# Altium PCB Madromys.PcbDoc
Units mm, origin at the board's own origin, x right, y up, seen from the top; angles counter-clockwise.
Board outline 62 x 68 mm, 4 copper layers (Top Layer, Plane 1, Plane 2, Bottom Layer), stack 0.781 mm thick; 82 components, 45 nets, 282 pads, 179 vias.
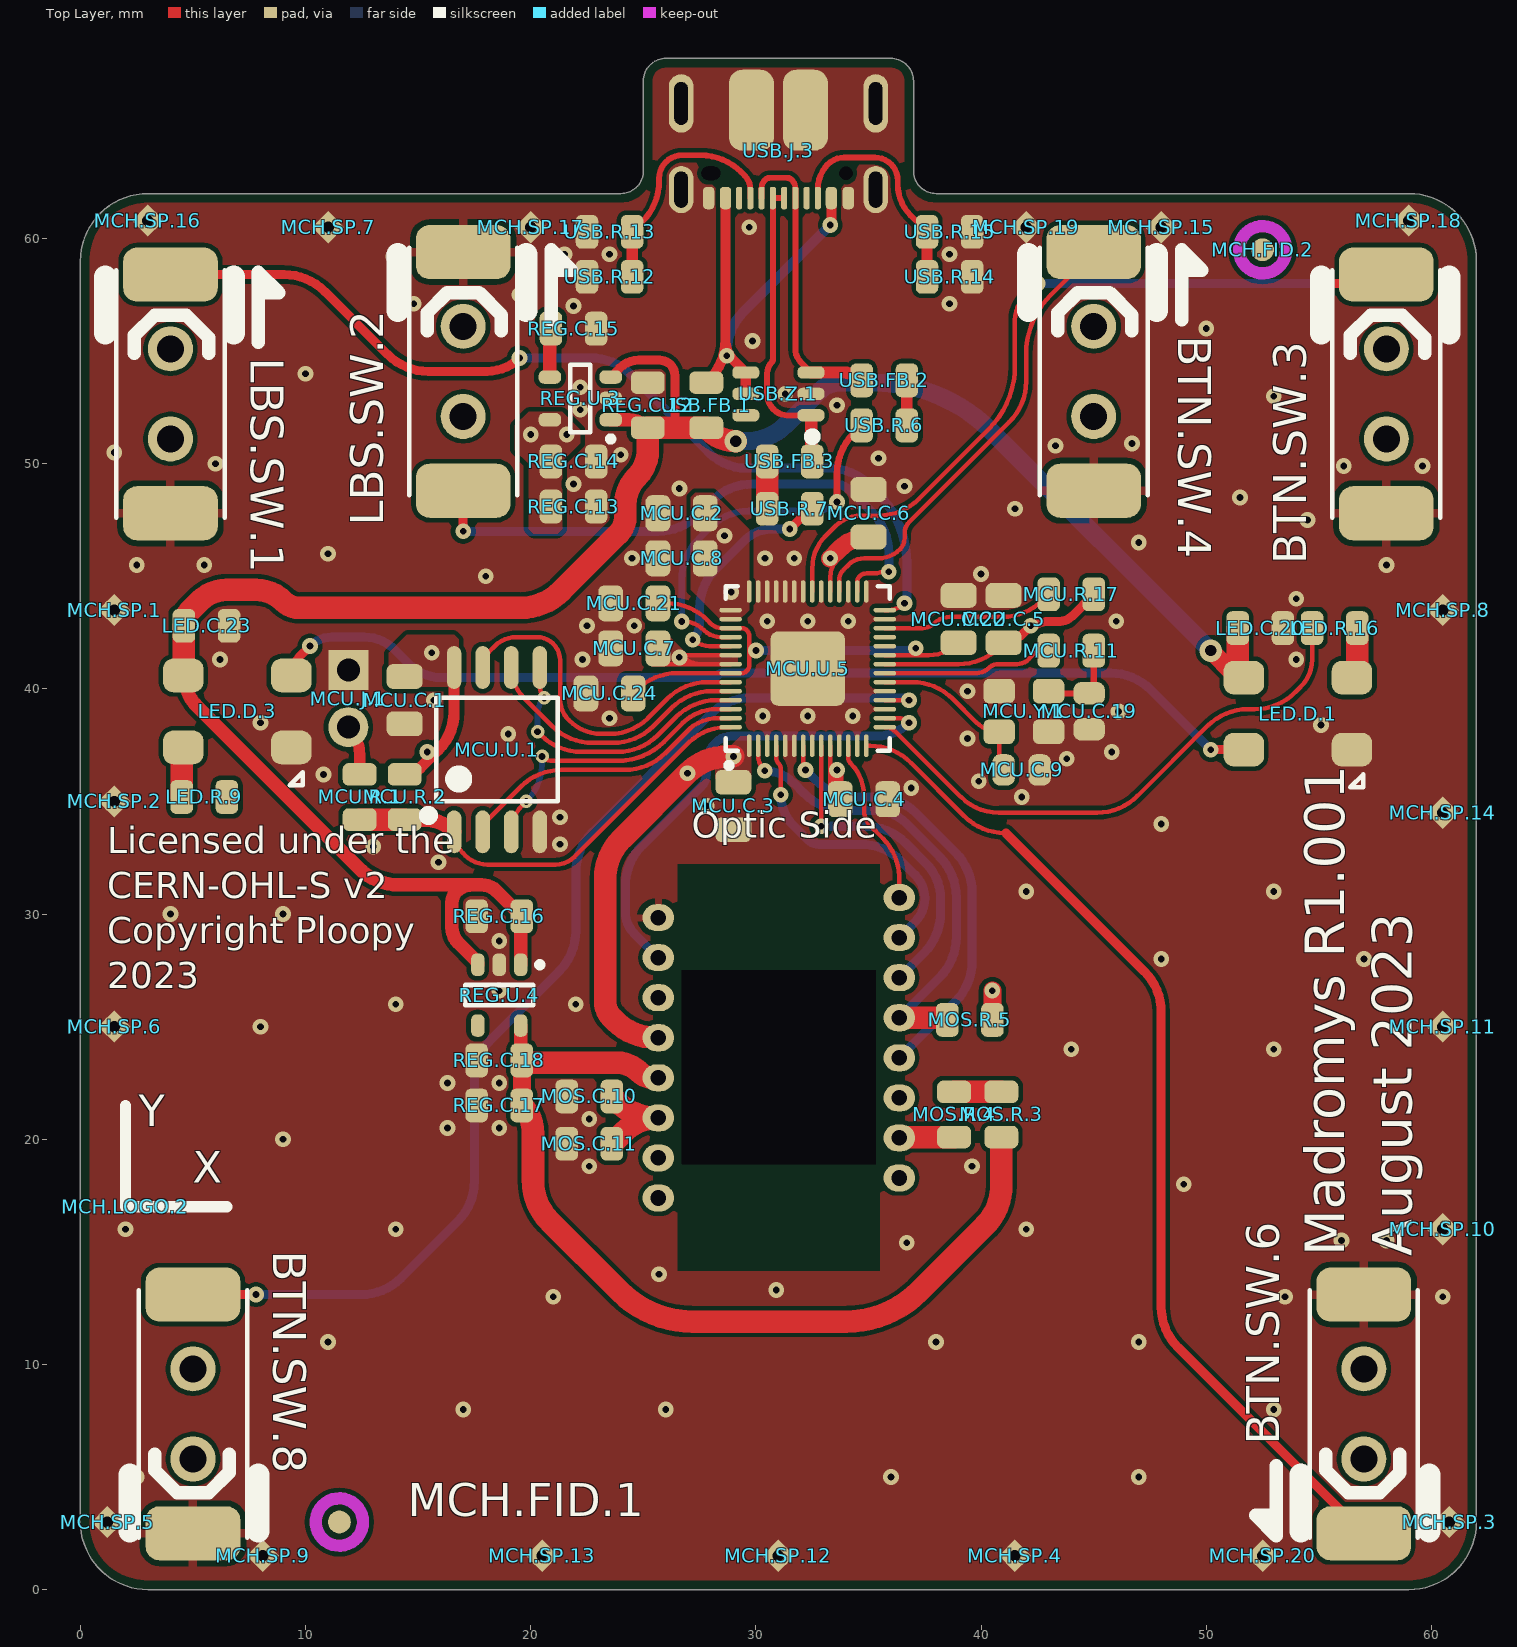
[diagram p0: Top Layer view]
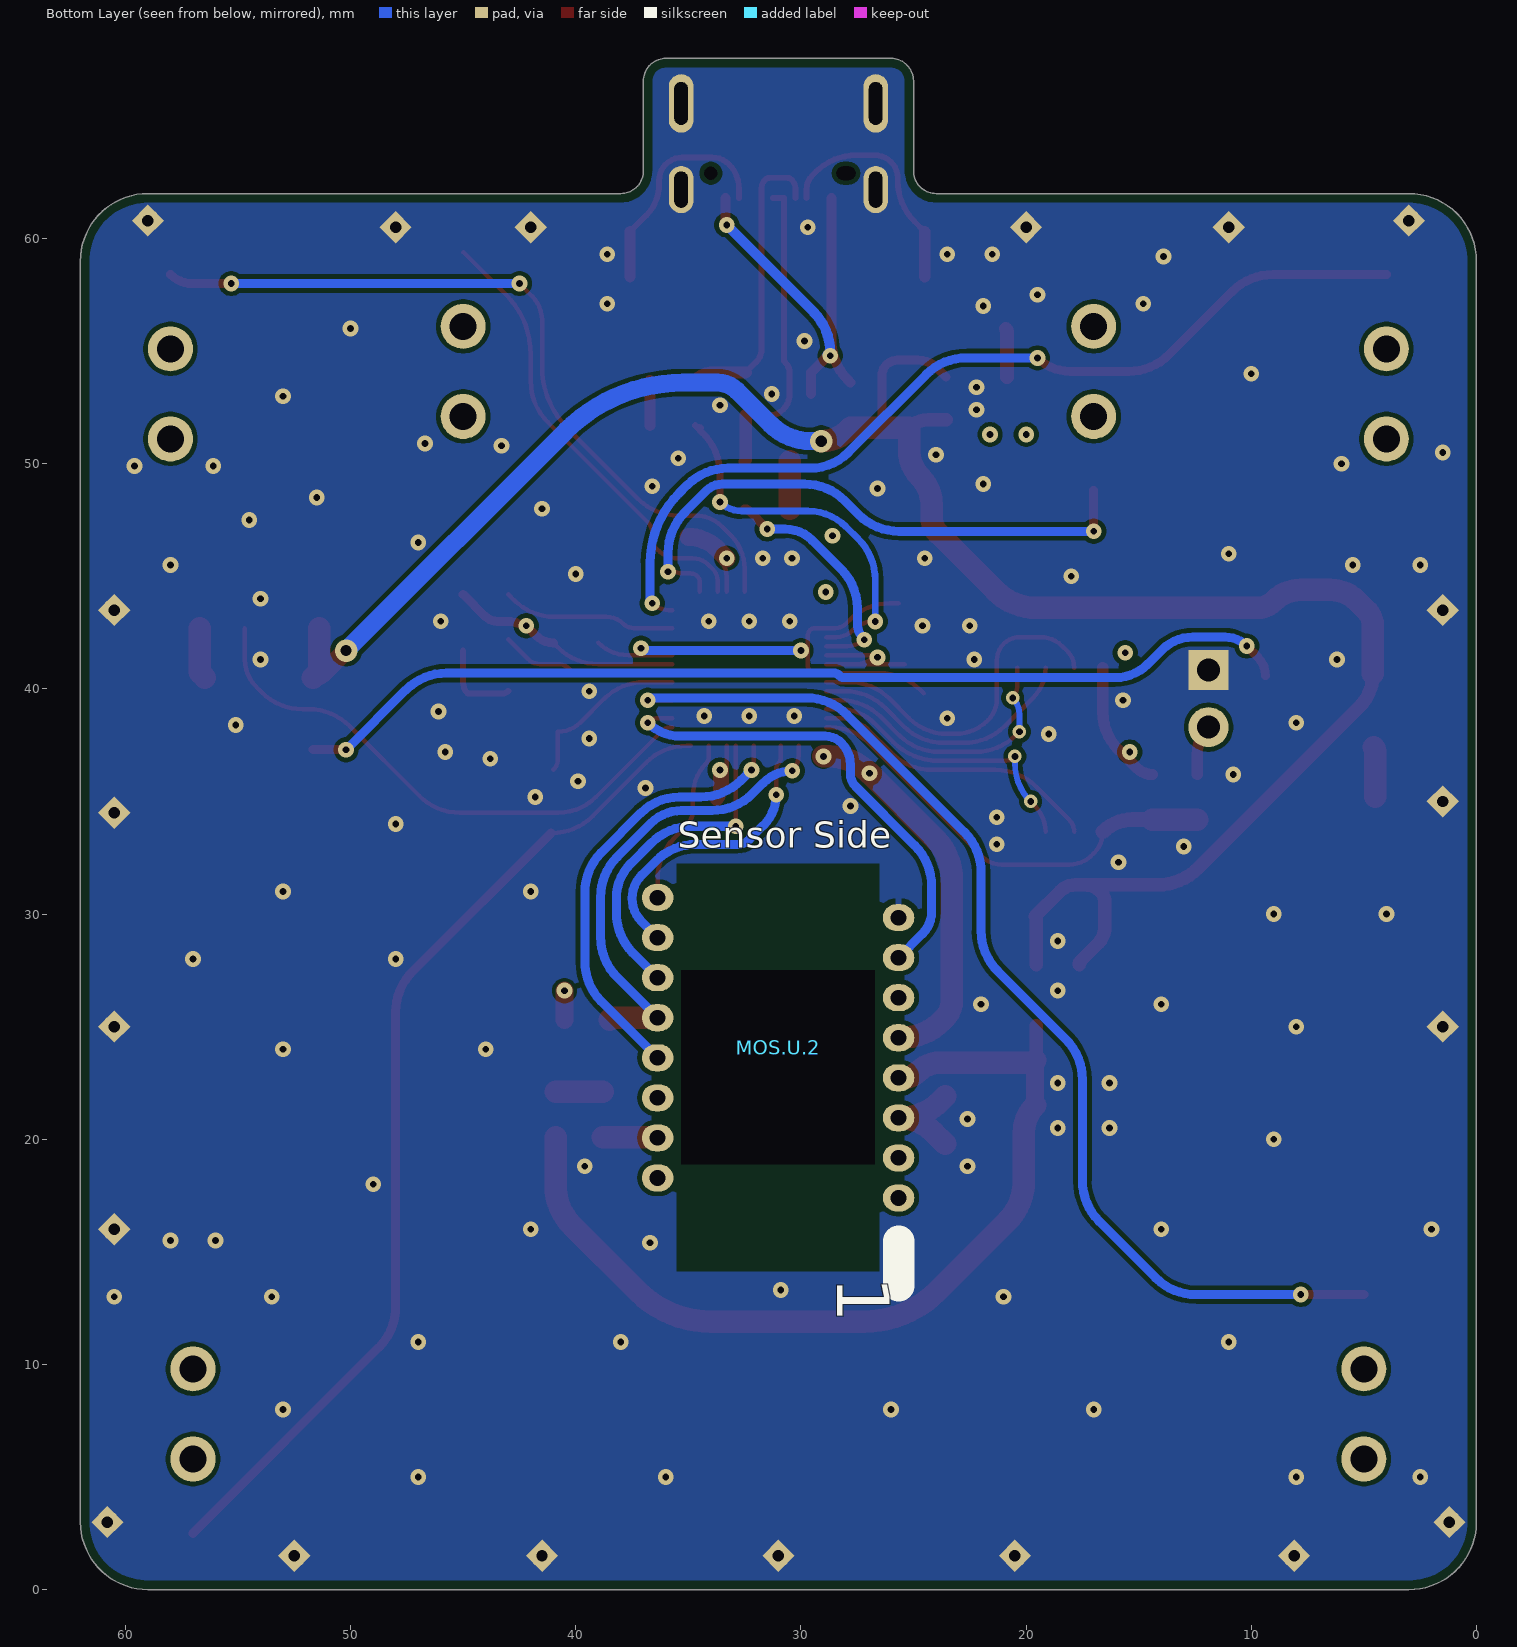
[diagram p1: Bottom Layer view, seen from below]
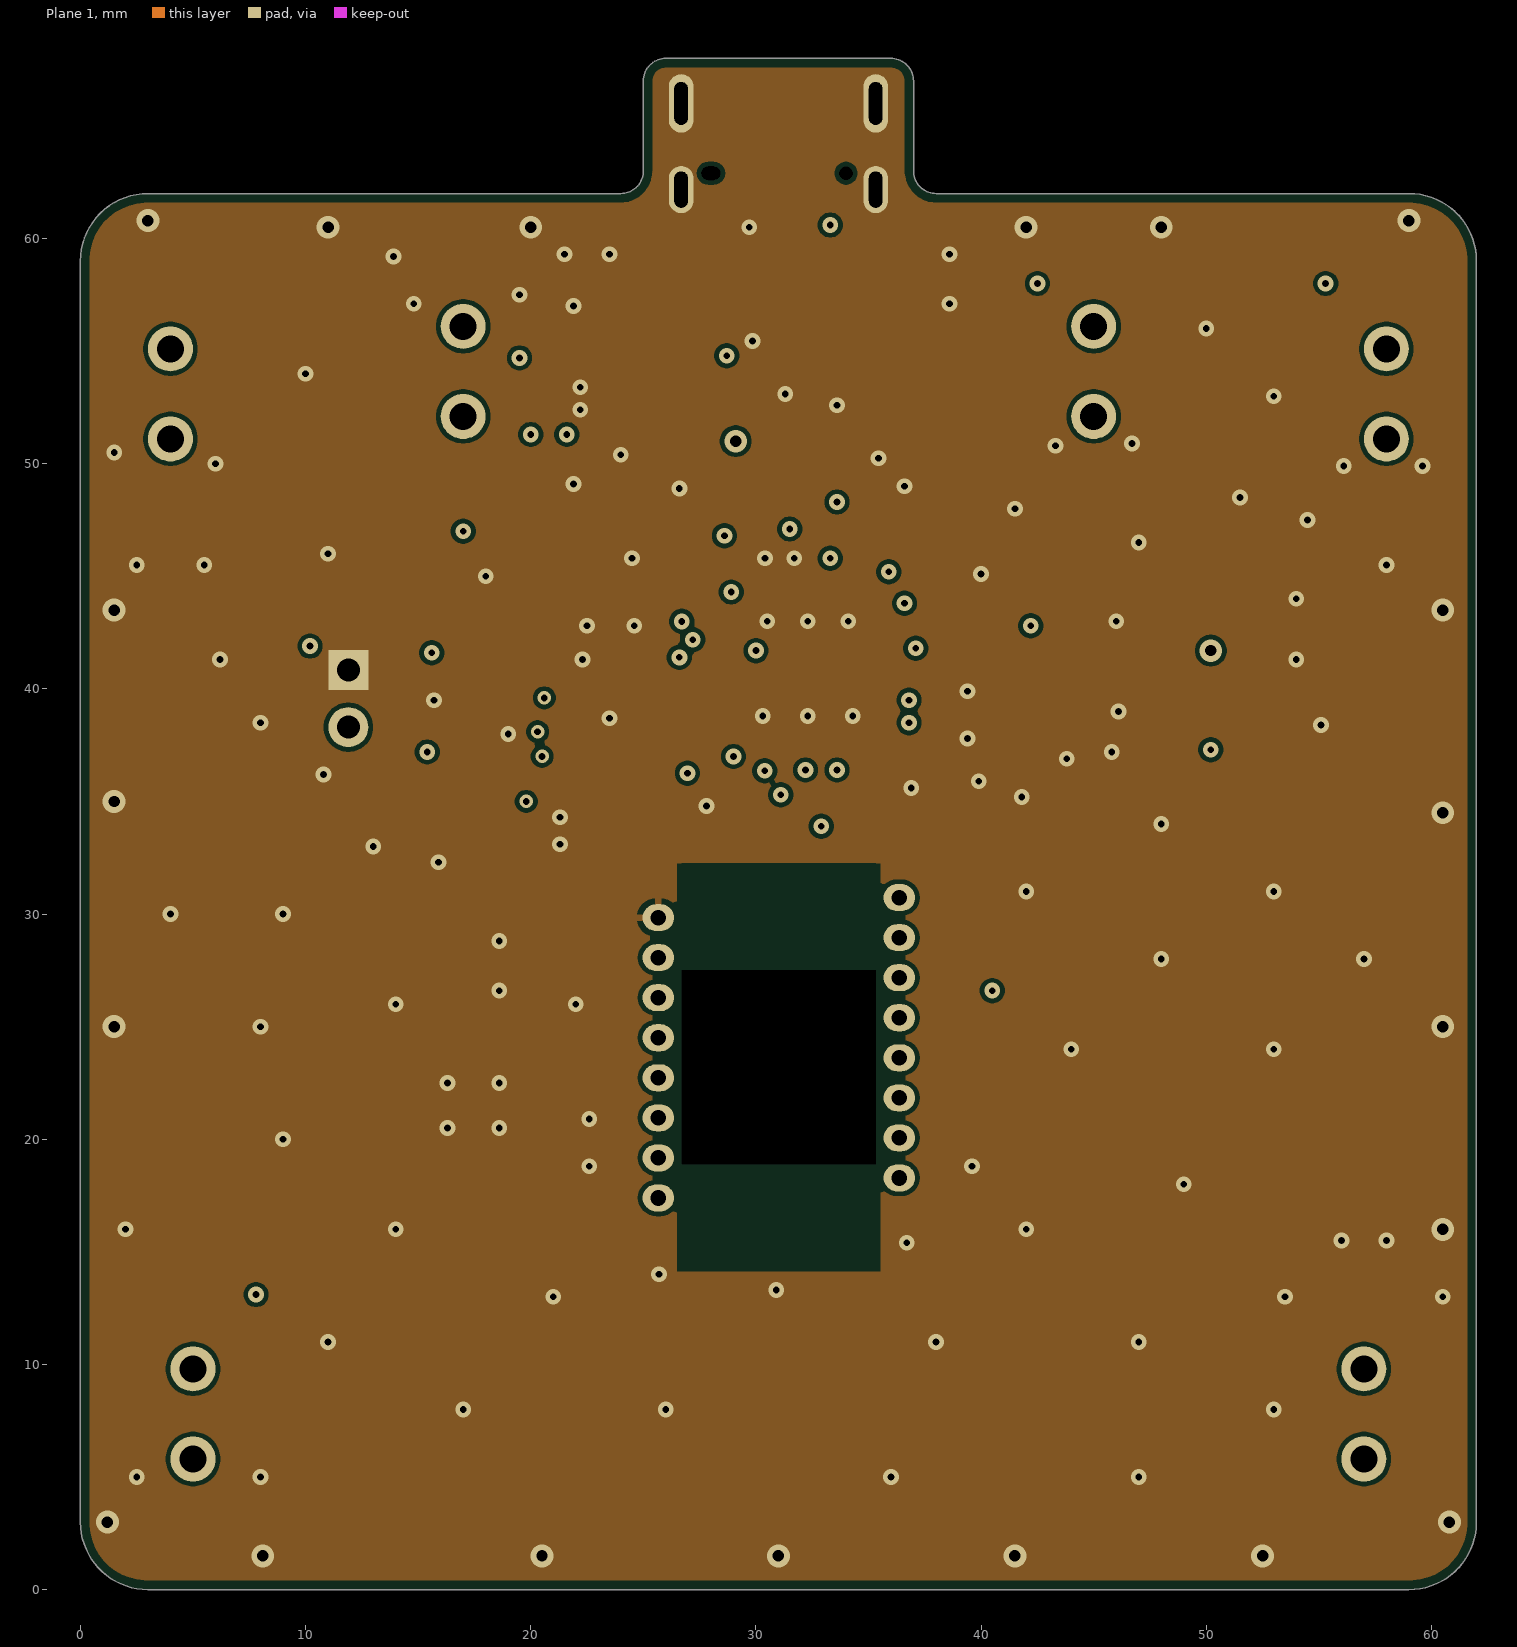
[diagram p2: Plane 1]
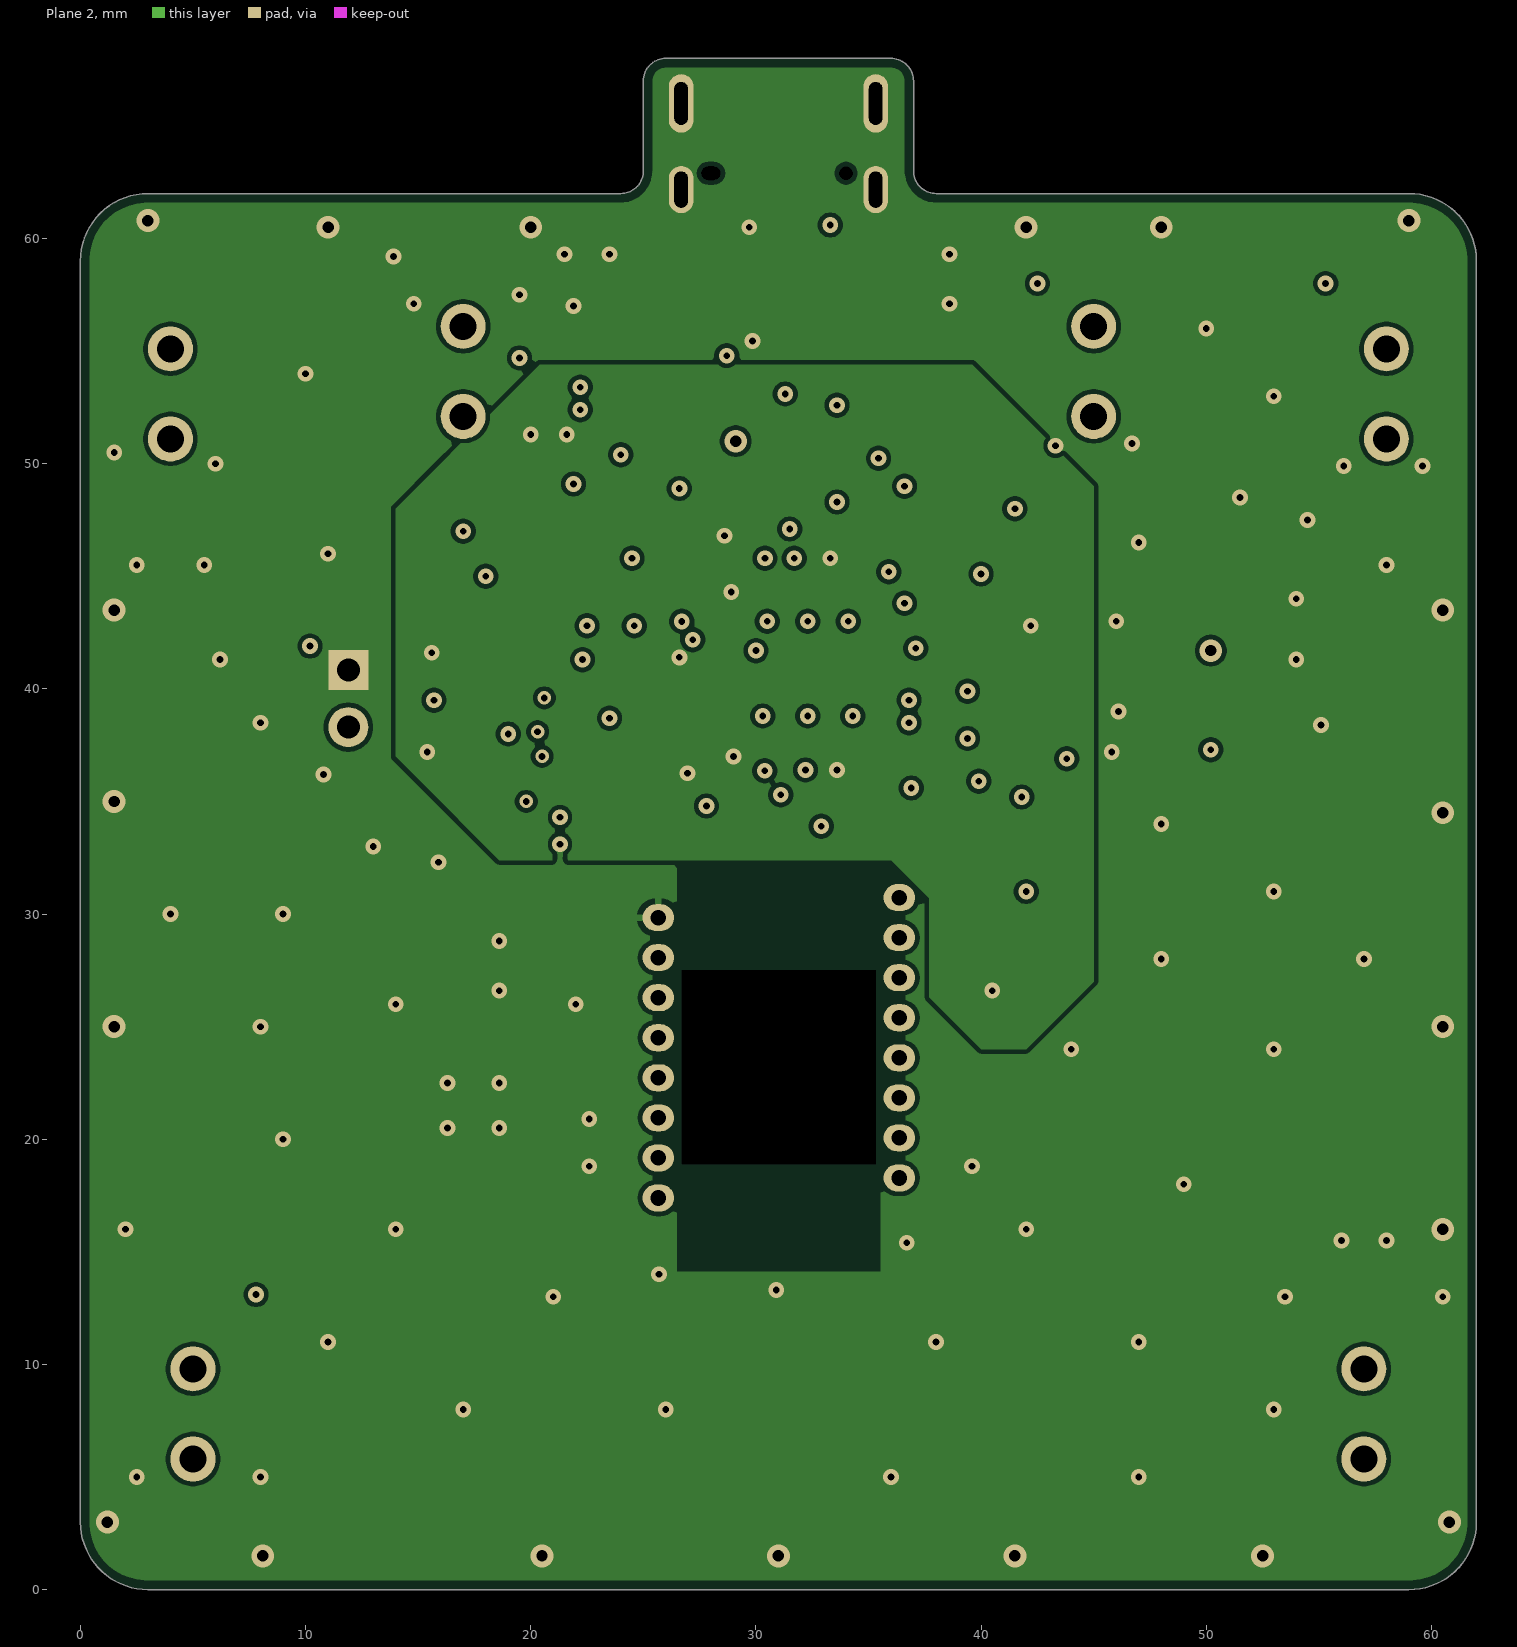
[diagram p3: Plane 2]

## Layer stack, top to bottom
Top Mask: solder mask 0.01, Solder Resist, Dk 3.5
Top Layer: signal copper 0.036
Dielectric 1: prepreg 0.127, FR-4, Dk 4.2
Plane 1: signal copper 0.036
Dielectric 4: core 0.383, Dk 4.2
Plane 2: signal copper 0.036
Dielectric 2: prepreg 0.127, Dk 4.2
Bottom Layer: signal copper 0.036
Bottom Solder: solder mask 0.01, Solder Resist, Dk 3.5

## Board outline
0,3 ccw(c3,3) 3,0 59,0 ccw(c59,3) 62,3 62,59 ccw(c59,59) 59,62 38,62 cw(c38,63) 37,63 37,67 ccw(c36,67) 36,68 26,68 ccw(c26,67) 25,67 25,63 cw(c24,63) 24,62 3,62 ccw(c3,59) 0,59

## Design rules (kind name [scope] priority, off if disabled: settings)
BoardOutlineClearance [(Not HasFootprint('SPARKGAP'))] p1: gap=0.4 ignorepadtopadclearanceinfootprint=FALSE except(0: Arc-SplitBarrior Arc-SplitContinuation Track-SplitBarrior Track-SplitContinuation Fill-SplitBarrior Fill-SplitContinuation Poly-SplitBarrior Poly-SplitContinuation Region-SplitBarrior Region-SplitContinuation Text-SplitBarrior Text-SplitContinuation)
Clearance "HighV Pads" [(InNetClass('HighV') AND (IsPad OR IsVia)) vs IsPad OR IsVia] p1: gap=0.4 ignorepadtopadclearanceinfootprint=FALSE except(0: Arc-Hole Track-Hole SMDPad-Hole THPad-Hole Via-Hole Fill-Hole Poly-Hole Region-Hole Text-Hole) // Establishes minimum clearance between bare pads that are high voltage, per IPC2221A Table 6-1, 51-100V, condition A6
Clearance Inter-Pad [IsPad vs IsPad] p2: gap=0.2 ignorepadtopadclearanceinfootprint=FALSE except(0: Arc-Hole Track-Hole SMDPad-Hole THPad-Hole Via-Hole Fill-Hole Poly-Hole Region-Hole Text-Hole)
Clearance "Spark Gaps" [InNetClass('Spark Gap') vs InNet('GND') And InPoly] p3: gap=0.635 ignorepadtopadclearanceinfootprint=FALSE except(0: Arc-Hole Track-Hole SMDPad-Hole THPad-Hole Via-Hole Fill-Hole Poly-Hole Region-Hole Text-Hole)
Clearance FIDs [Name like 'FID*'] p4: gap=1.016 ignorepadtopadclearanceinfootprint=FALSE except(0: Arc-Hole Track-Hole SMDPad-Hole THPad-Hole Via-Hole Fill-Hole Poly-Hole Region-Hole Text-Hole)
Clearance "Inner Planes" [InPoly AND OnMid] p5: gap=0.2 ignorepadtopadclearanceinfootprint=FALSE // Defines a larger clearance for planes on inner layers.
Clearance "All Planes" [InPoly] p6: gap=0.2 ignorepadtopadclearanceinfootprint=FALSE except(0: Arc-Hole Track-Hole SMDPad-Hole THPad-Hole Via-Hole Fill-Hole Poly-Hole Region-Hole Text-Hole) // Defines minimum clearance between planes on the same layer.
Clearance "Inner Layer Clearance" [OnMid vs OnMid] p7: gap=0.3 ignorepadtopadclearanceinfootprint=FALSE except(0: Arc-Hole Track-Hole SMDPad-Hole THPad-Hole Via-Hole Fill-Hole Poly-Hole Region-Hole Text-Hole) // We will give inner layers more spacing because they tend to be subject to stricter process limits.
Clearance [All] p8: gap=0.2 ignorepadtopadclearanceinfootprint=FALSE // 2 oz (70um) boards require at least 10mil spacing. We give a bit more to make sure things work well.
ComponentClearance "Terminal Block" [(HasFootprint('Phoenix 1933189 - Header')) vs (HasFootprint('Phoenix 1933189 - Header'))] p1: gap=-2.286 collisioncheckmode=3 verticalgap=0.254 showdistances=FALSE
ComponentClearance "FET/TP self Clearance" [(Name like 'Q*') Or (Name like 'TP*') vs (Name like 'Q*') Or (Name like 'TP*')] p2: gap=0.254 collisioncheckmode=3 verticalgap=0.254 showdistances=FALSE
ComponentClearance [Not ((Name like 'H*') Or (Name like 'FID*') Or (Name like 'SP*')) vs Not ((Name like 'H*') Or (Name like 'FID*') Or (Name like 'SP*'))] p3: gap=0.5 collisioncheckmode=3 verticalgap=0.5 showdistances=FALSE
DiffPairsRouting [All] p1: maxlimit=0.508 minlimit=0.279 mostfreqgap=0.381 toplayer_prefgap=0.279 toplayer_minwidth=0.279 toplayer_maxwidth=0.508 toplayer_prefwidth=0.381 midlayer2_mingap=0.305 midlayer2_minwidth=0.305 midlayer2_maxwidth=0.508 midlayer2_prefwidth=0.381 midlayer3_prefgap=0.279 midlayer3_minwidth=0.279 midlayer3_maxwidth=0.508 midlayer3_prefwidth=0.381 bottomlayer_prefgap=0.279 bottomlayer_minwidth=0.279 bottomlayer_maxwidth=0.508 bottomlayer_prefwidth=0.381 substack1={D919DD2D-F60F-4B9F-B5AE-F3E69D6E268F} toplayer_{d919dd2d-f60f-4b9f-b5ae-f3e69d6e268f}_minwidth=0.381 toplayer_{d919dd2d-f60f-4b9f-b5ae-f3e69d6e268f}_maxwidth=0.381 toplayer_{d919dd2d-f60f-4b9f-b5ae-f3e69d6e268f}_prefwidth=0.381 midlayer2_{d919dd2d-f60f-4b9f-b5ae-f3e69d6e268f}_minwidth=0.381 midlayer2_{d919dd2d-f60f-4b9f-b5ae-f3e69d6e268f}_maxwidth=0.381 midlayer2_{d919dd2d-f60f-4b9f-b5ae-f3e69d6e268f}_prefwidth=0.381 midlayer3_{d919dd2d-f60f-4b9f-b5ae-f3e69d6e268f}_minwidth=0.381 midlayer3_{d919dd2d-f60f-4b9f-b5ae-f3e69d6e268f}_maxwidth=0.381 midlayer3_{d919dd2d-f60f-4b9f-b5ae-f3e69d6e268f}_prefwidth=0.381 bottomlayer_{d919dd2d-f60f-4b9f-b5ae-f3e69d6e268f}_minwidth=0.381 bottomlayer_{d919dd2d-f60f-4b9f-b5ae-f3e69d6e268f}_maxwidth=0.381 bottomlayer_{d919dd2d-f60f-4b9f-b5ae-f3e69d6e268f}_prefwidth=0.381 maxuncoupledlength=12.7
Height [All] p1: minheight=0 maxheight=41 prefheight=12.7
HoleSize [All] p1: absolutevalues=TRUE maxlimit=100 minlimit=0.3 maxpercent=80.000 minpercent=20.000
HoleToHoleClearance [All] p1: gap=0.6 allowstackedmicrovias=TRUE
LayerPairs [All] p1: enforce=FALSE
MinimumSolderMaskSliver [All] p1: minsoldermaskwidth=0.09
NetAntennae [Not (HasFootprint('BALANCE_RESISTOR'))] p1: netantennaetolerance=0
PasteMaskExpansion [All] p1: expansion=-0.025
PlaneClearance [All] p1: clearance=0.3
PlaneConnect [All] p1: pad.planeconnectstyle=Relief pad.reliefexpansion=0.5 pad.reliefentries=4 pad.reliefconductorwidth=0.5 pad.reliefairgap=0.25 via.planeconnectstyle=Direct via.reliefexpansion=0.5 via.reliefentries=4 via.reliefconductorwidth=0.5 via.reliefairgap=0.25
PolygonConnect "PolygonConnect Spark Gap" [HasFootprint('SparkGap')] p1: connectstyle=Direct reliefconductorwidth=0.254 reliefentries=4 polygonreliefangle="90 Angle" airgapwidth=0.254 // This rule makes it so spark gaps get direct connections to ground planes.
PolygonConnect PolygonConnect_GND [All vs InNet('GND')] p2: connectstyle=Direct reliefconductorwidth=0.5 reliefentries=4 polygonreliefangle="90 Angle" airgapwidth=0.25 // This rule specifies all vias and holes connected to a GND plane have direct connections.
PolygonConnect [All] p3: connectstyle=Direct reliefconductorwidth=0.5 reliefentries=4 polygonreliefangle="90 Angle" airgapwidth=0.25
RoutingVias [All] p1: holewidth=0.5 width=1 viastyle="Through Hole" minholewidth=0.2 minwidth=0.5 maxholewidth=5.08 maxwidth=6.35
ShortCircuit [Not (InPadClass('TraceResistorPads')) vs Not (InPadClass('TraceResistorPads'))] p1: allowed=FALSE
SilkToBoardRegionClearance [All] p1 off:
SilkToSilkClearance [All] p1 off: silktosilkclearance=0.254
SilkToSolderMaskClearance SilkscreenOverComponentPads [IsPad] p1: minsilkscreentomaskgap=0.102 clearancetoexposedcopper=FALSE
SolderMaskExpansion SolderMaskExpansion_via [IsVia] p1: expansion=0.102 istentingtop=TRUE
SolderMaskExpansion [All] p2: expansion=0.076 istentingtop=FALSE
Width [All] p1: maxlimit=50.8 minlimit=0.2 preferedwidth=0.4 midlayer2_minwidth=0.35 midlayer3_minwidth=0.35 bottomlayer_minwidth=0.26 substack1={D919DD2D-F60F-4B9F-B5AE-F3E69D6E268F} toplayer_{d919dd2d-f60f-4b9f-b5ae-f3e69d6e268f}_minwidth=0.26 midlayer2_{d919dd2d-f60f-4b9f-b5ae-f3e69d6e268f}_minwidth=0.35 midlayer3_{d919dd2d-f60f-4b9f-b5ae-f3e69d6e268f}_minwidth=0.35 bottomlayer_{d919dd2d-f60f-4b9f-b5ae-f3e69d6e268f}_minwidth=0.26 minimp=50.000000 maximp=50.000000 favimp=50.000000
15 further rules are at their usual default settings.

## Classes and differential pairs
component class LED: LED.C.20 LED.C.23 LED.D.1 LED.D.3 LED.R.9 LED.R.16
component class BTN: BTN.SW.3 BTN.SW.4 BTN.SW.6 BTN.SW.8 LBS.SW.1 LBS.SW.2
component class USB: USB.FB.1 USB.FB.2 USB.FB.3 USB.J.3 USB.R.6 USB.R.7 USB.R.12 USB.R.13 USB.R.14 USB.R.15 USB.Z.1
component class REG: REG.C.12 REG.C.13 REG.C.14 REG.C.15 REG.C.16 REG.C.17 REG.C.18 REG.U.3 REG.U.4
component class MOS: MOS.C.10 MOS.C.11 MOS.R.3 MOS.R.4 MOS.R.5 MOS.U.2
component class MCU: MCU.C.1 MCU.C.2 MCU.C.3 MCU.C.4 MCU.C.5 MCU.C.6 MCU.C.7 MCU.C.8 MCU.C.9 MCU.C.19 MCU.C.21 MCU.C.22 MCU.C.24 MCU.J.1 MCU.R.1 MCU.R.2 MCU.R.11 MCU.R.17 MCU.U.1 MCU.U.5 MCU.Y.1
component class MCH: MCH.FID.1 MCH.FID.2 MCH.LOGO.2 MCH.SP.1 MCH.SP.2 MCH.SP.3 MCH.SP.4 MCH.SP.5 MCH.SP.6 MCH.SP.7 MCH.SP.8 MCH.SP.9 MCH.SP.10 MCH.SP.11 MCH.SP.12 MCH.SP.13 MCH.SP.14 MCH.SP.15 MCH.SP.16 MCH.SP.17 MCH.SP.18 MCH.SP.19 MCH.SP.20

## Components (designator, comment, footprint, x,y, rotation, side; value= is the part's Value field where it differs from the comment)
BTN.SW.3 "D2LS-21" D2LS-21 58,53.1 r270 top (schematic designator SW3)
BTN.SW.4 "D2LS-21" D2LS-21 45,54.1 r270 top (schematic designator SW4)
BTN.SW.6 "D2LS-21" D2LS-21 57,7.8 r90 top (schematic designator SW6)
BTN.SW.8 "D2LS-21" D2LS-21 5,7.8 r90 top (schematic designator SW8)
LBS.SW.1 "D2LS-21" D2LS-21 4,53.1 r270 top (schematic designator SW1)
LBS.SW.2 "D2LS-21" D2LS-21 17,54.1 r270 top (schematic designator SW2)
LED.C.20 "0805" 0805 52.4,42.7 r270 top value="0.1uF 100V" (schematic designator C20)
LED.C.23 "0805" 0805 5.6,42.8 r270 top value="0.1uF 100V" (schematic designator C23)
LED.D.1 "IN-PI55TATPRPGPB" IN-PI55TATPRPGPB 54.07,38.9 r0 top (schematic designator D1)
LED.D.3 "IN-PI55TATPRPGPB" IN-PI55TATPRPGPB 6.97,39 r0 top (schematic designator D3)
LED.R.9 "0805" 0805 5.5,35.2 r270 top value="1k 1%" (schematic designator R9)
LED.R.16 "0805" 0805 55.7,42.7 r270 top value="1k 1%" (schematic designator R16)
MCH.FID.1 "IPC-7351 Fiducial 1mm" FIDUCIAL_1.5 11.5,3 r90 top (schematic designator FID1)
MCH.FID.2 "IPC-7351 Fiducial 1mm" FIDUCIAL_1.5 52.5,59.5 r90 top (schematic designator FID2)
MCH.LOGO.2 "Coordinate system marker for assembly" "Coordinate System" 2,17 r0 top (schematic designator LOGO2)
MCH.SP.1 "Spark Gap" SparkGap 1.5,43.5 r90 top (schematic designator SP1)
MCH.SP.2 "Spark Gap" SparkGap 1.5,35 r90 top (schematic designator SP2)
MCH.SP.3 "Spark Gap" SparkGap 60.8,3 r90 top (schematic designator SP3)
MCH.SP.4 "Spark Gap" SparkGap 41.5,1.5 r90 top (schematic designator SP4)
MCH.SP.5 "Spark Gap" SparkGap 1.2,3 r90 top (schematic designator SP5)
MCH.SP.6 "Spark Gap" SparkGap 1.5,25 r90 top (schematic designator SP6)
MCH.SP.7 "Spark Gap" SparkGap 11,60.5 r90 top (schematic designator SP7)
MCH.SP.8 "Spark Gap" SparkGap 60.5,43.5 r90 top (schematic designator SP8)
MCH.SP.9 "Spark Gap" SparkGap 8.1,1.5 r90 top (schematic designator SP9)
MCH.SP.10 "Spark Gap" SparkGap 60.5,16 r90 top (schematic designator SP10)
MCH.SP.11 "Spark Gap" SparkGap 60.5,25 r90 top (schematic designator SP11)
MCH.SP.12 "Spark Gap" SparkGap 31,1.5 r90 top (schematic designator SP12)
MCH.SP.13 "Spark Gap" SparkGap 20.5,1.5 r90 top (schematic designator SP13)
MCH.SP.14 "Spark Gap" SparkGap 60.5,34.5 r90 top (schematic designator SP14)
MCH.SP.15 "Spark Gap" SparkGap 48,60.5 r90 top (schematic designator SP15)
MCH.SP.16 "Spark Gap" SparkGap 3,60.8 r90 top (schematic designator SP16)
MCH.SP.17 "Spark Gap" SparkGap 20,60.5 r90 top (schematic designator SP17)
MCH.SP.18 "Spark Gap" SparkGap 59,60.8 r90 top (schematic designator SP18)
MCH.SP.19 "Spark Gap" SparkGap 42,60.5 r90 top (schematic designator SP19)
MCH.SP.20 "Spark Gap" SparkGap 52.5,1.5 r90 top (schematic designator SP20)
MCU.C.1 "0805 X5R" "0805 - TALL" 14.4,39.5 r180 top value="0.1uF 100V" (schematic designator C1)
MCU.C.2 "0805 X5R" "0805 - TALL" 26.7,47.8 r90 top value="1uF 25V" (schematic designator C2)
MCU.C.3 "0805 X5R" "0805 - TALL" 29,34.8 r180 top value="0.1uF 100V" (schematic designator C3)
MCU.C.4 "0805 X5R" "0805 - TALL" 34.8,35.1 r270 top value="0.1uF 100V" (schematic designator C4)
MCU.C.5 "0805 X5R" "0805 - TALL" 41,43.1 r0 top value="0.1uF 100V" (schematic designator C5)
MCU.C.6 "0805 X5R" "0805 - TALL" 35,47.8 r0 top value="0.1uF 100V" (schematic designator C6)
MCU.C.7 "0805 X5R" "0805 - TALL" 24.6,41.8 r90 top value="0.1uF 100V" (schematic designator C7)
MCU.C.8 "0805 X5R" "0805 - TALL" 26.7,45.8 r90 top value="0.1uF 100V" (schematic designator C8)
MCU.C.9 "0603" 0603 41.8,36.4 r270 top value="18pF 50V" (schematic designator C9)
MCU.C.19 "0603" 0603 44.8,39 r0 top value="18pF 50V" (schematic designator C19)
MCU.C.21 "0805 X5R" "0805 - TALL" 24.6,43.8 r90 top value="1uF 25V" (schematic designator C21)
MCU.C.22 "0805 X5R" "0805 - TALL" 39,43.1 r0 top value="0.1uF 100V" (schematic designator C22)
MCU.C.24 "0805 X5R" "0805 - TALL" 23.5,39.8 r90 top value="0.1uF 100V" (schematic designator C24)
MCU.J.1 "HEADER2" 2x1 11.9,40.84 r0 top (schematic designator J1)
MCU.R.1 "0805" 0805 12.4,35.2 r0 top value="1k 1%" (schematic designator R1)
MCU.R.2 "0805" 0805 14.4,35.2 r0 top value="10k 1%" (schematic designator R2)
MCU.R.11 "0805" 0805 44,41.7 r90 top value="1k 1%" (schematic designator R11)
MCU.R.17 "0805" 0805 44,44.2 r270 top value="1k 1%" (schematic designator R17)
MCU.U.1 "W25Q16JVSSIQ" "W25Q128JVS - SOIC127P790X216-8M" 18.5,37.3 r90 top (schematic designator U1)
MCU.U.5 "RP2040" "RP2040 - QFN40P700X700X90_HS-57M" 32.3,40.9 r90 top (schematic designator U5)
MCU.Y.1 "RH100-12.000-16-3030" RH100-12.000-16-3030 41.9,39 r0 top (schematic designator Y1)
MOS.C.10 "0805" 0805 22.6,21.9 r90 top value="10uF 25V" (schematic designator C10)
MOS.C.11 "0805" 0805 22.6,19.8 r90 top value="0.1uF 100V" (schematic designator C11)
MOS.R.3 "0805" 0805 40.9,21.1 r0 top value="22R 1%" (schematic designator R3)
MOS.R.4 "0805" 0805 38.8,21.1 r180 top value="22R 1%" (schematic designator R4)
MOS.R.5 "0805" 0805 39.5,25.3 r90 top value="10k 1%" (schematic designator R5)
MOS.U.2 "PMW3360DM-T2QU" PMW3360DM-T2QU 25.666,17.395 r270 bottom (schematic designator U2)
REG.C.12 "0805" 0805 25.2,52.6 r0 top value="1uF 25V" (schematic designator C12)
REG.C.13 "0805" 0805 21.9,48.1 r270 top value="10uF 25V" (schematic designator C13)
REG.C.14 "0805" 0805 21.9,50.1 r270 top value="1uF 25V" (schematic designator C14)
REG.C.15 "0805" 0805 21.9,56 r270 top value="100pF 100V" (schematic designator C15)
REG.C.16 "0805" 0805 18.6,29.9 r90 top value="1uF 25V" (schematic designator C16)
REG.C.17 "0805" 0805 18.6,21.5 r90 top value="10uF 25V" (schematic designator C17)
REG.C.18 "0805" 0805 18.6,23.5 r90 top value="1uF 25V" (schematic designator C18)
REG.U.3 "AP2202K-3.3" "AP2202 - SOT95P270X145-5N" 22.2,52.9 r180 top (schematic designator U3)
REG.U.4 "AP2204K-1.8" "AP2202 - SOT95P270X145-5N" 18.6,26.4 r270 top (schematic designator U4)
USB.FB.1 "ACML-0805-601-T" 0805 27.8,52.6 r0 top (schematic designator FB1)
USB.FB.2 "ACML-0805-601-T" 0805 35.7,53.7 r90 top (schematic designator FB2)
USB.FB.3 "ACML-0805-601-T" 0805 31.5,50.1 r270 top (schematic designator FB3)
USB.J.3 "DX07S016JA1R1500" DX07S016JA1R1500 31,64.8 r180 top (schematic designator J3)
USB.R.6 "0805" 0805 35.698,51.7 r270 top value="22R 1%" (schematic designator R6)
USB.R.7 "0805" 0805 31.5,48 r90 top value="22R 1%" (schematic designator R7)
USB.R.12 "0805" 0805 23.5,58.3 r90 top value="10k 1%" (schematic designator R12)
USB.R.13 "0805" 0805 23.5,60.3 r90 top value="10k 1%" (schematic designator R13)
USB.R.14 "0805" 0805 38.6,58.3 r270 top value="10k 1%" (schematic designator R14)
USB.R.15 "0805" 0805 38.6,60.3 r270 top value="10k 1%" (schematic designator R15)
USB.Z.1 "IP4220CZ6,125" "PESD3V3S4UD - SOT95P275X110-6N" 31,53.1 r180 top (schematic designator Z1)

## Footprints (in the part's own frame and the unit in brackets; to place one, negate y for a bottom-side part, rotate by r counter-clockwise, add the part's x,y. Pads: shape width x height; smd on the part's side, far side on the other; paste and mask are expansions set on the pad)
2x1 [mil]
  rect 70x70 hole 40 paste-3897.64: 1(0,0)
  round 70 hole 40 paste-3897.64: 2(0,-100)
  body extent -50,-150 50,50, height 339
0603 [mm] "Chip Capacitor, 2-Leads, Body 1.6x0.8mm, IPC Medium Density"
  rrect70% 1.4x1 smd paste+0: 1(0,-0.8) 2(0,0.8)
  body extent -0.48,-0.88 0.48,0.87, height 0.65
0805 [mm] "Chip Capacitor, 2-Leads, Body 2.0x1.3mm, IPC Medium Density"
  rrect50% 1.5x1 smd paste+0: 1(0,1.002) 2(0,-1.002)
  body extent -0.72,-1.1 0.72,1.1, height 0.8
"0805 - TALL" [mm] "Same as 0805 footprint, but solder mask is adjusted to leave more paste behind for tall (>0.9mm) components like big caps, which tend to be solder-starved on the regular footprint."
  rrect50% 1.6x1.1 smd paste+0: 1(0,1.052) 2(0,-1.052)
  body extent -0.72,-1.1 0.72,1.1, height 0.8
"AP2202 - SOT95P270X145-5N" [mm] "SOT23, 5-Leads, Body 2.92x2.70mm, Pitch 0.95mm, IPC Medium Density"
  rrect80% 1x0.6 smd paste-0.04: 1(-1.35,0.95) 2(-1.35,0) 3(-1.35,-0.95) 4(1.35,-0.95) 5(1.35,0.95)
  silkscreen extent -1.48,-1.5 0.45,1.92, body extent -0.85,-1.52 0.85,1.52, height 1.45
"Coordinate System" [mm]
  silkscreen extent 0,0 4.5,4.5
D2LS-21 [mm]
  rrect50% 2.4x4.2 smd paste-0.05: A(-5.3,0) B(5.3,0)
  round 2 hole 1.2: ""(-2,0) ""(2,0)
  silkscreen extent -5.5,-2.9 5.5,2.8, body extent -5.6,-2.4 5.6,2.4, height 3.19
DX07S016JA1R1500 [mm] "USB-C (USB TYPE-C) USB 2.0 Receptacle Connector 24 (16+8 Dummy) Position Surface Mount, Right Angle; Through Hole"
  rrect70% 0.5x1 smd paste-0.05 mask+0.05: 1(-3.1,3) 2(-2.35,3) 11(2.35,3) 12(3.1,3)
  rrect70% 0.27x1 smd paste-0.04 mask+0.05: 3(-1.75,3) 4(-1.25,3) 5(-0.75,3) 6(-0.25,3) 7(0.25,3) 8(0.75,3) 9(1.25,3) 10(1.75,3)
  rrect100% 1.1x2.6 hole 0.6 slot 1.9 at 90 deg paste-99 mask+0.1: SHELL(-4.32,-1.2) SHELL(4.32,-1.2)
  rrect100% 1.1x2.1 hole 0.6 slot 1.6 at 90 deg paste-99 mask+0.1: SHELL(-4.32,2.625) SHELL(4.32,2.625)
  rrect60% 2x3.6 smd paste-0.12 mask+0.05: SHELL(-1.2,-0.9) SHELL(1.2,-0.9)
  round 0 hole 0.6: ""(-3,1.9)
  round 0 hole 0.6 slot 0.85 at 0 deg: ""(3,1.9)
  body extent -4.47,-3.65 4.47,3.25, height 3.18
FIDUCIAL_1.5 [mil]
  round 40 smd paste-60 mask+30: 1(0,0)
  Top Layer keep-out circle w21.65: c0,0 r41.34
IN-PI55TATPRPGPB [mm]
  rrect60% 1.8x1.5 smd paste-0.04 mask+0.06: 1(-2.4,1.6) 2(-2.4,-1.6) 3(2.4,-1.6) 4(2.4,1.6)
  silkscreen extent 2.32,-3.27 2.9,-2.7, body extent -2.5,-2.5 2.5,2.5, height 1.6
"PESD3V3S4UD - SOT95P275X110-6N" [mm] "SOT23, 6-Leads, Body 2.90x2.75mm, Pitch 0.95mm, IPC Medium Density"
  rrect80% 1.2x0.55 smd paste-0.03 mask+0.085: 1(-1.45,0.95) 2(-1.45,0) 3(-1.45,-0.95) 4(1.45,-0.95) 5(1.45,0) 6(1.45,0.95)
  silkscreen extent -1.63,1.78 -1.38,2.02, body extent -0.85,-1.55 0.85,1.55, height 1.1
PMW3360DM-T2QU [mm]
  oval 1.2x1.4 hole 0.7: 1(0,0) 2(-1.778,0) 3(-3.556,0) 4(-5.334,0) 5(-7.112,0) 6(-8.89,0) 7(-10.668,0) 8(-12.446,0) 9(-13.335,-10.7) 10(-11.557,-10.7) 11(-9.779,-10.7) 12(-8.001,-10.7) 13(-6.223,-10.7) 14(-4.445,-10.7) 15(-2.667,-10.7) 16(-0.889,-10.7)
  rect 0x0 hole 8.6 square unplated: ""(-5.8,-5.35)
  silkscreen extent 1.92,0 3.9,0, body extent -16.06,-14.76 5.09,4.09, height 2.44
RH100-12.000-16-3030 [mm] "3.2mm x 2.5mm crystal"
  rrect50% 1.4x1.1 smd paste-0.1: 1(-1.1,-0.9) 2(1.1,-0.9) 3(1.1,0.9) 4(-1.1,0.9)
  body extent -1.6,-1.25 1.6,1.25, height 1
"RP2040 - QFN40P700X700X90_HS-57M" [mm] "QFN, 56-Leads, Body 7.00x7.00mm, Pitch 0.40mm, Thermal Pad 3.10x3.10mm, IPC Low Density"
  oval 1x0.2 smd paste-99 mask+0.05: 1(-3.425,2.6) 2(-3.425,2.2) 3(-3.425,1.8) 4(-3.425,1.4) 5(-3.425,1) 6(-3.425,0.6) 7(-3.425,0.2) 8(-3.425,-0.2) 9(-3.425,-0.6) 10(-3.425,-1) 11(-3.425,-1.4) 12(-3.425,-1.8) 13(-3.425,-2.2) 14(-3.425,-2.6) 29(3.425,-2.6) 30(3.425,-2.2) 31(3.425,-1.8) 32(3.425,-1.4) 33(3.425,-1) 34(3.425,-0.6) 35(3.425,-0.2) 36(3.425,0.2) 37(3.425,0.6) 38(3.425,1) 39(3.425,1.4) 40(3.425,1.8) 41(3.425,2.2) 42(3.425,2.6)
  oval 0.2x1 smd paste-99 mask+0.05: 15(-2.6,-3.425) 16(-2.2,-3.425) 17(-1.8,-3.425) 18(-1.4,-3.425) 19(-1,-3.425) 20(-0.6,-3.425) 21(-0.2,-3.425) 22(0.2,-3.425) 23(0.6,-3.425) 24(1,-3.425) 25(1.4,-3.425) 26(1.8,-3.425) 27(2.2,-3.425) 28(2.6,-3.425) 43(2.6,3.425) 44(2.2,3.425) 45(1.8,3.425) 46(1.4,3.425) 47(1,3.425) 48(0.6,3.425) 49(0.2,3.425) 50(-0.2,3.425) 51(-0.6,3.425) 52(-1,3.425) 53(-1.4,3.425) 54(-1.8,3.425) 55(-2.2,3.425) 56(-2.6,3.425)
  rrect20% 3.3x3.3 smd paste-99: 57(0,0)
  silkscreen extent -4.42,-3.65 3.65,3.65, body extent -3.5,-3.5 3.5,3.5, height 0.9
SparkGap [mil]
  rect 40x40 smd rot 45 paste-99 mask+4: 1(0,0)
  rect 40x40 smd far side rot 45 paste-99 mask+4: 1(0,0)
"W25Q128JVS - SOIC127P790X216-8M" [mm] "SOIC, 8-Leads, Body 5.28x5.28mm, Pitch 1.27mm, IPC Low Density"
  oval 1.9x0.65 smd paste-0.05: 1(-3.65,1.905) 2(-3.65,0.635) 3(-3.65,-0.635) 4(-3.65,-1.905) 5(3.65,-1.905) 6(3.65,-0.635) 7(3.65,0.635) 8(3.65,1.905)
  silkscreen extent -3.05,-2.7 2.3,3.17, body extent -2.7,-2.7 2.7,2.7, height 2.16

## Part data
BTN.SW.3 BTN.SW.4 BTN.SW.6 BTN.SW.8 LBS.SW.1 LBS.SW.2: "Compact Surface-mounting Switch for long durability", Supplier Part Number 1=Z4378CT-ND, Supplier 1=Digi-Key, Supplier 2=Mouser, Supplier Part Number 2=653-D2LS-21
LED.C.20 LED.C.23 MCU.C.1 MCU.C.3 MCU.C.4 MCU.C.5 MCU.C.6 MCU.C.7 MCU.C.8 MCU.C.22 MCU.C.24 MOS.C.11: library part "Cap 0.1uF 100V", "0805, X5R or better", Supplier Part Number 1=1276-6840-2-ND, Supplier 1=Digi-Key
  MOS.C.11: PNP-A=0, PNP-da=0, PNP-dx=0, PNP-dy=0, PNP-FeedType=Tape, PNP-Level=1, PNP-Lv=1, PNP-Nzl=2, PNP-PlacePriority=1, PNP-Pt=0, PNP-TapeIndex=1, PNP-TapeWidth=8, PNP-Thk=1.05, PNP-TS=70, PNP-Type=chi, PNP-Voff=0, PNP-W=0, PNP-X=2.00, PNP-Y=1.25
LED.D.1 LED.D.3: "ADDRESS LED DISCRETE SERIAL RGB", Supplier Part Number 1=1830-1204-1-ND, Supplier 1=Digi-Key, Supplier 2=Arrow, Supplier 3=Mouser, Supplier Part Number 2=IN-PI55TATPRPGPB, Supplier Part Number 3=743-IN-PI55TATPRPGPB
LED.R.9 LED.R.16 MCU.R.1 MCU.R.11 MCU.R.17: library part "Res 1k 1% 0805", "Chip resistor, 1/8W 100PPM", Supplier Part Number 1=RMCF0805FT1K00TR-ND, Supplier 1=Digi-Key
MCH.FID.1 MCH.FID.2: library part FIDUCIAL_1.5, PNP-A=1, PNP-da=0, PNP-dx=0, PNP-dy=0, PNP-FeedType=Fiducial, PNP-Level=1, PNP-Lv=1, PNP-Nzl=2, PNP-PlacePriority=0, PNP-Pt=0, PNP-TapeIndex=0, PNP-TapeWidth=0, PNP-Thk=1.02, PNP-TS=70, PNP-Type=MARK1, PNP-Voff=0, PNP-W=0, PNP-X=4, PNP-Y=4
MCH.LOGO.2: library part CoordinateSystem
MCH.SP.1 MCH.SP.2 MCH.SP.3 MCH.SP.4 MCH.SP.5 MCH.SP.6 MCH.SP.7 MCH.SP.8 MCH.SP.9 MCH.SP.10 MCH.SP.11 MCH.SP.12 MCH.SP.13 MCH.SP.14 MCH.SP.15 MCH.SP.16 MCH.SP.17 MCH.SP.18 MCH.SP.19 MCH.SP.20: "Open square pad for spark gapping", PNP-A=0, PNP-da=0, PNP-dx=0, PNP-dy=0, PNP-FeedType=Tape, PNP-Level=1, PNP-Lv=1, PNP-Nzl=2, PNP-PlacePriority=1, PNP-Pt=0, PNP-TapeIndex=1, PNP-TapeWidth=8, PNP-Thk=1, PNP-TS=70, PNP-Type=CHI, PNP-Voff=0, PNP-W=0, PNP-X=1, PNP-Y=1
MCU.C.2 MCU.C.21 REG.C.12 REG.C.14 REG.C.16 REG.C.18: library part "Cap 1uF 25V", "0805, X5R or better", Supplier Part Number 1=1276-1066-2-ND, Supplier 1=Digi-Key, Supplier 2=Digi-Key, Supplier Part Number 2=1276-1066-1-ND
  REG.C.12 REG.C.14 REG.C.16 REG.C.18: PNP-A=0, PNP-da=0, PNP-dx=0, PNP-dy=0, PNP-FeedType=Tape, PNP-Level=1, PNP-Lv=1, PNP-Nzl=2, PNP-PlacePriority=1, PNP-Pt=0, PNP-TapeIndex=1, PNP-TapeWidth=8, PNP-Thk=1.25, PNP-TS=70, PNP-Type=chi, PNP-Voff=0, PNP-W=0, PNP-X=2.00, PNP-Y=1.25
MCU.C.9 MCU.C.19: library part "Cap 18pF 50V", "0603, C0G or better", Supplier Part Number 1=1292-1494-1-ND, Supplier 1=Digi-Key
MCU.J.1: "2-pin 0.100\" header", Supplier Part Number 1=855-M20-9990245, Supplier 1=Mouser, Supplier 2=Digi-Key, Supplier Part Number 2=952-2261-ND
MCU.R.2 MOS.R.5 USB.R.12 USB.R.13 USB.R.14 USB.R.15: library part "Res 10k 1% 0805", "Chip resistor", Supplier Part Number 1=RMCF0805FT10K0TR-ND, Supplier 1=Digi-Key
  MOS.R.5: PNP-A=0, PNP-da=0, PNP-dx=0, PNP-dy=0, PNP-FeedType=Tape, PNP-Level=1, PNP-Lv=1, PNP-Nzl=2, PNP-PlacePriority=1, PNP-Pt=0, PNP-TapeIndex=1, PNP-TapeWidth=8, PNP-Thk=0.55, PNP-TS=70, PNP-Type=chi, PNP-Voff=0, PNP-W=0, PNP-X=2.00, PNP-Y=1.25
MCU.U.1: Supplier Part Number 1=W25Q16JVSSIQ-ND, Supplier 1=Digi-Key
MCU.U.5: Supplier Part Number 1=49AJ8740, Supplier 1=Newark
MCU.Y.1: "12MHz Crystal 16pF 100 Ohms 4-SMD, No Lead (3.2mm x 2.5mm)", Supplier Part Number 1=XC2686CT-ND, Supplier 1=Digi-Key, Supplier 2=Mouser, Supplier Part Number 2=520-160-12-30B-AGMT
MOS.C.10 REG.C.13 REG.C.17: library part "Cap 10uF 25V", "0805, X5R or better", Supplier Part Number 1=81-GRM21BR61E106KA3L, PNP-A=0, PNP-da=0, PNP-dx=0, PNP-dy=0, PNP-FeedType=Tape, PNP-Level=1, PNP-Lv=1, PNP-Nzl=2, PNP-PlacePriority=1, PNP-Pt=0, PNP-TapeIndex=1, PNP-TapeWidth=8, PNP-Thk=1.25, PNP-TS=70, PNP-Type=chi, PNP-Voff=0, PNP-W=0, PNP-X=2.00, PNP-Y=1.25, Supplier 1=Mouser, Supplier 2=Digi-Key, Supplier Part Number 2=490-5523-1-ND
MOS.R.3 MOS.R.4 USB.R.6 USB.R.7: library part "Res 22R 1% 0805", "Chip resistor", Supplier Part Number 1=RMCF0805FT22R0CT-ND, PNP-A=0, PNP-da=0, PNP-dx=0, PNP-dy=0, PNP-FeedType=Tape, PNP-Level=1, PNP-Lv=1, PNP-Nzl=2, PNP-PlacePriority=1, PNP-Pt=0, PNP-TapeIndex=1, PNP-TapeWidth=8, PNP-Thk=0.55, PNP-TS=70, PNP-Type=chi, PNP-Voff=0, PNP-W=0, PNP-X=2.00, PNP-Y=1.25, Supplier 1=Digi-Key, Supplier 2=Arrow, Supplier Part Number 2=RMCF0805FT22R0
MOS.U.2: "Optical Gaming Navigation Sensor", PNP-A=0, PNP-da=0, PNP-dx=0, PNP-dy=0, PNP-FeedType=Tape, PNP-Level=1.3, PNP-Lv=26, PNP-Nzl=4, PNP-PlacePriority=3, PNP-Pt=0, PNP-TapeIndex=2, PNP-TapeWidth=12, PNP-Thk=1.45, PNP-TS=70, PNP-Type=QFP, PNP-Voff=0, PNP-W=0.1, PNP-X=4.9, PNP-Y=3.9
REG.C.15: library part "Cap 100pF 100V", "0805, X5R or better", Supplier Part Number 1=1276-2426-1-ND, PNP-A=0, PNP-da=0, PNP-dx=0, PNP-dy=0, PNP-FeedType=Tape, PNP-Level=1, PNP-Lv=1, PNP-Nzl=2, PNP-PlacePriority=1, PNP-Pt=0, PNP-TapeIndex=1, PNP-TapeWidth=8, PNP-Thk=0.60, PNP-TS=70, PNP-Type=chi, PNP-Voff=0, PNP-W=0, PNP-X=2.00, PNP-Y=1.25, Supplier 1=Digi-Key, Supplier 2=Digi-Key, Supplier 3=Arrow, Supplier Part Number 2=1276-2426-2-ND, Supplier Part Number 3=L5XIfgkrxsBQF2sGZ85JNyFE59-nywaq7sHwLppiklbTEIlO4Ffw3x4_A6bjf4Mm
REG.U.3: "3.3V 150mA LDO regulator", Supplier Part Number 1=621-AP2202K-3.3TRG1, PNP-A=90, PNP-da=0, PNP-dx=0, PNP-dy=0, PNP-FeedType=Tape, PNP-Level=1, PNP-Lv=26, PNP-Nzl=2, PNP-PlacePriority=3, PNP-Pt=0, PNP-TapeIndex=1, PNP-TapeWidth=8, PNP-Thk=1, PNP-TS=90, PNP-Type=CHP, PNP-Voff=0, PNP-W=0, PNP-X=2.9, PNP-Y=1.3, Supplier 1=Mouser, Supplier 2=Digi-Key, Supplier 3=Arrow, Supplier Part Number 2=AP2202K-3.3TRG1DICT-ND, Supplier Part Number 3=PWagzdsTFFHKE_U17B45SP-NtndBrheJIaI5hB7gHD0ZVywxIBNyoAQstvnyfZZ0
REG.U.4: "Linear Voltage Regulator IC 1 Output 150mA SOT-23-5", Supplier Part Number 1=AP2204K-1.8TRG1DICT-ND, PNP-A=90, PNP-da=0, PNP-dx=0, PNP-dy=0, PNP-FeedType=Tape, PNP-Level=1, PNP-Lv=26, PNP-Nzl=2, PNP-PlacePriority=3, PNP-Pt=0, PNP-TapeIndex=1, PNP-TapeWidth=8, PNP-Thk=1, PNP-TS=90, PNP-Type=CHP, PNP-Voff=0, PNP-W=0, PNP-X=2.9, PNP-Y=1.3, Supplier 1=Digi-Key, Supplier 2=Mouser, Supplier Part Number 2=621-AP2204K-1.8TRG1
USB.FB.1 USB.FB.2 USB.FB.3: "FERRITE BEAD 600 OHM 0805 1LN", Supplier Part Number 1=535-12556-1-ND, PNP-A=0, PNP-da=0, PNP-dx=0, PNP-dy=0, PNP-FeedType=Tape, PNP-Level=1, PNP-Lv=1, PNP-Nzl=2, PNP-PlacePriority=1, PNP-Pt=0, PNP-TapeIndex=1, PNP-TapeWidth=8, PNP-Thk=0.55, PNP-TS=70, PNP-Type=chi, PNP-Voff=0, PNP-W=0, PNP-X=2.00, PNP-Y=1.25, Supplier 1=Digi-Key
USB.J.3: "USB-C (USB TYPE-C) USB 2.0 Receptacle Connector 24 (16+8 Dummy) Position Surface Mount, Right Angle; Through Hole", Supplier Part Number 1=670-DX07S016JA1R1500CT-ND, Supplier 1=Digi-Key, Supplier 2=Mouser, Supplier Part Number 2=656-DX07S016JA1R1500
USB.Z.1: "TVS DIODE 5.5V 6TSOP (Low capacitance, USB)", PNP-A=270, PNP-da=0, PNP-dx=0, PNP-dy=0, PNP-FeedType=Tape, PNP-Level=1, PNP-Lv=26, PNP-Nzl=2, PNP-PlacePriority=3, PNP-Pt=0, PNP-TapeIndex=1, PNP-TapeWidth=8, PNP-Thk=1, PNP-TS=90, PNP-Type=CHP, PNP-Voff=0, PNP-W=0, PNP-X=2.9, PNP-Y=1.3

## Via types
v1: diameter 0.7, hole 0.3, Top Layer to Bottom Layer, tented both sides, 153 vias
v2: diameter 1.016, hole 0.508, Top Layer to Bottom Layer, tented both sides, 20 vias
v3: diameter 0.6, hole 0.3, Top Layer to Bottom Layer, tented both sides, 4 vias
v4: diameter 1, hole 0.5, Top Layer to Bottom Layer, tented both sides, 2 vias

## Nets (pads, with @x,y where several pads share a name; then routed paths per layer and width w, separated by ;. In a path a pad name is that pad's centre, name@x,y a point inside that pad or via, vN(x,y) a via of type N, cw(c..) or ccw(c..) an arc to the next point about the centre after c; other vN are vias at no path point)
1V1: MCU.C.21.2 MCU.C.22.2 MCU.C.24.2 MCU.U.5.23 MCU.U.5.45 MCU.U.5.50 | length 22.1
  Top Layer w0.2: MCU.C.24.2 24.708,39.956 cw(c26.505,38.16) 26.505,40.7 MCU.U.5.50 29.359,40.7 ccw(c29.359,41.041) 29.6,40.8 ccw(c29.359,41.041) 29.7,41.041 29.7,42.359 ccw(c29.359,42.359) 29.6,42.6 ccw(c29.359,42.359) 29.359,42.7 MCU.U.5.45 MCU.U.5.45@28.475,42.7 ; MCU.C.21.2 26.048,43.8 cw(c26.048,41.26) 27.844,43.056 28,42.9 ccw(c28.483,43.383) MCU.U.5.45@28.449,42.701 ; MCU.U.5.23 37.678,41.5 ccw(c37.678,43.37) MCU.C.22.2 ; MCU.U.5.45@28.449,42.701 ccw(c28.475,43.1) MCU.U.5.45@28.475,42.7 ; MCU.U.5.45@28.449,42.701 ccw(c28.475,43.1) MCU.U.5.45@28.475,42.7
  Bottom Layer w0.4: v1(30,41.7) 36.859,41.7 ccw(c36.859,42.041) v1(37.1,41.8)
1V8: MOS.R.3.2 MOS.U.2.4 REG.C.17.2 REG.C.18.2 REG.U.4.5 | length 42
  Top Layer w0.6: REG.U.4.5 19.55,23.552 REG.C.18.2
  Top Layer w0.8: REG.C.17.2 REG.C.18.2
  Top Layer w1: REG.C.17.2 cw(c18.401,20.299) 20.1,20.299 20.1,18.152 ccw(c22.64,18.152) 20.844,16.356 23.956,13.244 ccw(c27.201,16.489) 27.201,11.9 33.999,11.9 ccw(c33.999,16.489) 37.244,13.244 40.156,16.156 ccw(c38.36,17.952) 40.9,17.952 MOS.R.3.2 ; REG.C.18.2 ccw(c19.844,23.741) 19.844,23.4 23.834,23.4 cw(c23.834,22.034) 24.8,23 ccw(c25.454,23.654) 25.454,22.729 MOS.U.2.4
3V3: MCU.C.1.2 MCU.C.2.2 MCU.C.3.2 MCU.C.4.2 MCU.C.5.2 MCU.C.6.2 MCU.C.7.2 MCU.C.8.2 MCU.R.2.1 MCU.R.17.1 MCU.U.1.8 MCU.U.5.1 MCU.U.5.10 MCU.U.5.22 MCU.U.5.33 MCU.U.5.42 MCU.U.5.43 MCU.U.5.44 MCU.U.5.48 MCU.U.5.49 MOS.R.5.2 MOS.U.2.5 REG.C.13.2 REG.C.14.2 REG.U.3.5 | length 47.5
  Top Layer w0.2: MCU.C.7.2@25.4,41.1 27.524,41.1 ; MCU.U.5.49 27.524,41.1 ; MCU.U.5.48 26.9,41.5 26.8,41.4 ccw(c27.524,42.124) 27.524,41.1 ; MCU.C.4.2@33.3,35.4 MCU.U.5.10 ; MCU.U.5.33 33.3,44.976 cw(c34.324,44.976) v1@33.6,45.7 ; MCU.U.5.22 39,41.1 ccw(c39,43.64) 40.796,41.844 MCU.C.5.2
  Top Layer w0.4: MCU.C.5.2 ccw(c41,43.128) 41.764,42.364 41.9,42.5 cw(c43.107,41.293) 43.107,43 43.5,43 ccw(c43.5,43.73) 44.016,43.214 MCU.R.17.1
  Top Layer w0.5: MCU.R.2.1 ccw(c14.4,37.174) 15.087,36.487 15.9,37.3 ccw(c14.222,38.978) 16.595,38.978 MCU.U.1.8
  Top Layer w0.6: v1(33.6,36.4) 33.6,35.456 ccw(c34.104,35.456) MCU.C.4.2
  Top Layer w0.8: v1(33.3,45.8) 33.716,46.216 cw(c35,44.931) 34.493,46.675 cw(c35,44.931) MCU.C.6.2 ; v1(40.5,26.6) 40.5,25.302 MOS.R.5.2
  Top Layer w1: MOS.U.2.5 25.545,24.507 cw(c25.545,27.047) 23.749,25.251 23.6,25.4 cw(c24.324,26.124) 23.3,26.124 23.3,31.548 cw(c25.84,31.548) 24.044,33.344 v1(26.956,36.256) cw(c28.752,34.46) 28.752,37 v1(29,37)
  other v1: 15.4,37.2 26.6,41.4 15.6,41.6 42.2,42.8 28.9,44.3 28.6,46.8 20,51.3 21.6,51.3
GND: BTN.SW.3.B BTN.SW.4.B BTN.SW.6.B BTN.SW.8.A LBS.SW.1.B LBS.SW.2.A LED.C.20.1 LED.C.23.1 LED.D.1.3 LED.D.3.3 MCH.SP.1.1 MCH.SP.2.1 MCH.SP.3.1 MCH.SP.4.1 MCH.SP.5.1 MCH.SP.6.1 MCH.SP.7.1 MCH.SP.8.1 MCH.SP.9.1 MCH.SP.10.1 MCH.SP.11.1 MCH.SP.12.1 MCH.SP.13.1 MCH.SP.14.1 MCH.SP.15.1 MCH.SP.16.1 MCH.SP.17.1 MCH.SP.18.1 MCH.SP.19.1 MCH.SP.20.1 MCU.C.1.1 MCU.C.2.1 MCU.C.3.1 MCU.C.4.1 MCU.C.5.1 MCU.C.6.1 MCU.C.7.1 MCU.C.8.1 MCU.C.9.2 MCU.C.19.1 MCU.C.21.1 MCU.C.22.1 MCU.C.24.1 MCU.J.1.1 MCU.U.1.4 MCU.U.5.3 MCU.U.5.5 MCU.U.5.6 MCU.U.5.8 MCU.U.5.11 MCU.U.5.13 MCU.U.5.17 MCU.U.5.19 MCU.U.5.27 MCU.U.5.29 MCU.U.5.31 MCU.U.5.34 MCU.U.5.36 MCU.U.5.37 MCU.U.5.38 MCU.U.5.39 MCU.U.5.40 MCU.U.5.41 MCU.U.5.57 MCU.Y.1.2 MCU.Y.1.4 MOS.C.10.1 MOS.C.11.1 MOS.U.2.8 REG.C.12.1 REG.C.13.1 REG.C.14.1 REG.C.15.1 REG.C.16.1 REG.C.17.1 REG.C.18.1 REG.U.3.2 REG.U.4.2 USB.J.3.1 USB.J.3.12 USB.J.3.SHELL USB.R.12.1 USB.R.13.1 USB.R.14.1 USB.R.15.1 USB.Z.1.2
  other v1: 2.5,5 8,5 36,5 47,5 17,8 26,8 53,8 11,11 38,11 47,11 21,13 53.5,13 60.5,13 30.9,13.3 25.7,14 36.7,15.4 56,15.5 58,15.5 2,16 14,16 42,16 49,18 22.6,18.8 39.6,18.8 9,20 16.3,20.5 18.6,20.5 22.6,20.9 16.3,22.5 18.6,22.5 44,24 53,24 8,25 14,26 22,26 18.6,26.6 48,28 57,28 18.6,28.8 4,30 9,30 42,31 53,31 15.9,32.3 13,33 21.3,33.1 48,34 21.3,34.3 27.8,34.8 41.8,35.2 36.9,35.6 39.9,35.9 10.8,36.2 43.8,36.9 45.8,37.2 39.4,37.8 19,38 55.1,38.4 8,38.5 23.5,38.7 30.3,38.8 32.3,38.8 34.3,38.8 46.1,39 15.7,39.5 39.4,39.9 6.2,41.3 22.3,41.3 54,41.3 22.5,42.8 24.6,42.8 30.5,43 32.3,43 34.1,43 46,43 54,44 18,45 40,45.1 2.5,45.5 5.5,45.5 58,45.5 24.5,45.8 30.4,45.8 31.7,45.8 11,46 47,46.5 54.5,47.5 41.5,48 51.5,48.5 26.6,48.9 36.6,49 21.9,49.1 56.1,49.9 59.6,49.9 6,50 35.448,50.24 24,50.4 1.5,50.5 43.3,50.8 46.7,50.9 22.2,52.4 33.6,52.6 53,53 31.3,53.1 22.2,53.4 10,54 29.845,55.445 50,56 21.9,57 14.8,57.1 38.6,57.1 19.5,57.5 13.9,59.2 21.5,59.3 23.5,59.3 38.6,59.3 29.7,60.5
  other v2: 8.1,1.5 20.5,1.5 31,1.5 41.5,1.5 52.5,1.5 1.2,3 60.8,3 60.5,16 1.5,25 60.5,25 60.5,34.5 1.5,35 1.5,43.5 60.5,43.5 11,60.5 20,60.5 42,60.5 48,60.5 3,60.8 59,60.8
LEDData: LED.R.16.2 MCU.U.5.15 | length 24.6
  Top Layer w0.2: MCU.U.5.15 cw(c35.725,37.636) 36.194,38.106 39.1,35.2 ccw(c40.79,36.89) 40.79,34.5 45.148,34.5 ccw(c45.148,37.04) 46.944,35.244 50.056,38.356 cw(c51.852,36.56) 51.852,39.1 52.148,39.1 ccw(c52.148,41.64) 53.944,39.844 54.199,40.099 ccw(c52.996,41.302) 54.698,41.302 LED.R.16.2
NetBTN.SW.3_A: BTN.SW.3.A MCU.U.5.35 | length 34.4
  Top Layer w0.2: MCU.U.5.35 32.5,45.348 cw(c34.557,45.348) 33.103,46.803 33.5,47.2 cw(c34.707,45.993) 34.707,47.7 35.448,47.7 ccw(c35.448,50.24) 37.244,48.444 40.351,51.551 ccw(c37.579,54.324) 41.5,54.324 41.5,56.372 cw(c43.016,56.372) 41.944,57.444 v1(42.5,58)
  Top Layer w0.4: v1(55.3,58) 57.034,58 ccw(c57.034,59.366) BTN.SW.3.A
  Bottom Layer w0.4: v1(42.5,58) v1(55.3,58)
NetBTN.SW.4_A: BTN.SW.4.A MCU.U.5.32 | length 20.2
  Top Layer w0.2: MCU.U.5.32 33.7,44.817 cw(c34.383,44.817) 33.9,45.3 34.117,45.517 cw(c34.8,44.834) 34.8,45.8 35.434,45.8 ccw(c35.434,47.166) 36.4,46.2 ccw(c35.917,46.683) 36.6,46.683 36.6,46.9 cw(c37.324,46.9) 36.812,47.412 41.256,51.856 ccw(c39.46,53.652) 42,53.652 42,54.507 42,54.851 cw(c45.738,54.851) 43.095,57.495 BTN.SW.4.A
NetBTN.SW.6_A: BTN.SW.6.A MCU.U.5.14 | length 45.1
  Top Layer w0.2: MCU.U.5.14 35.073,37.475 cw(c35.073,34.935) 36.869,36.731 39.256,34.344 ccw(c41.052,36.14) 41.052,33.6 41.1,33.6
  Top Layer w0.4: 41.1,33.6 47.256,27.444 cw(c45.46,25.648) 48,25.648 48,12.552 ccw(c50.54,12.552) 48.744,10.756 BTN.SW.6.A
NetBTN.SW.8_B: BTN.SW.8.B MCU.U.5.18 | length 49.8
  Top Layer w0.2: MCU.U.5.18 v1(36.8,39.5)
  Top Layer w0.4: BTN.SW.8.B v1(7.8,13.1)
  Bottom Layer w0.4: v1(7.8,13.1) 12.448,13.1 ccw(c12.448,15.64) 14.244,13.844 16.756,16.356 ccw(c14.96,18.152) 17.5,18.152 17.5,22.648 cw(c20.04,22.648) 18.244,24.444 21.256,27.456 ccw(c19.46,29.252) 22,29.252 22,31.848 cw(c24.54,31.848) 22.744,33.644 27.956,38.856 cw(c29.752,37.06) 29.752,39.6 36.559,39.6 cw(c36.559,39.259) v1(36.8,39.5)
NetLBS.SW.1_A: LBS.SW.1.A MCU.U.5.28 | length 41.5
  Top Layer w0.2: MCU.U.5.28 35.876,43.5 ccw(c35.876,44.524) v1(36.6,43.8)
  Top Layer w0.4: LBS.SW.1.A 6.7,58.4 9.048,58.4 cw(c9.048,55.86) 10.844,57.656 13.656,54.844 ccw(c15.452,56.64) 15.452,54.1 18.051,54.1 ccw(c18.051,56.149) v1(19.5,54.7)
  Bottom Layer w0.4: v1(19.5,54.7) 22.648,54.7 cw(c22.648,52.16) 24.444,53.956 27.9,50.5 ccw(c29.59,52.19) 29.59,49.8 33.248,49.8 cw(c33.248,47.26) 35.044,49.056 35.422,48.678 cw(c32.337,45.593) 36.7,45.593 36.7,44.041 cw(c36.359,44.041) v1(36.6,43.8)
NetLBS.SW.2_B: LBS.SW.2.B MCU.U.5.30 | length 26
  Top Layer w0.2: MCU.U.5.30 34.5,44.759 cw(c34.841,44.759) 34.6,45 cw(c34.912,44.687) 34.912,45.129 35.246,45.129 ccw(c35.246,46.054) v1@35.9,45.4
  Top Layer w0.4: v1(17,47) LBS.SW.2.B
  Bottom Layer w0.4: v1(17,47) 25.648,47 ccw(c25.648,49.54) 27.444,47.744 28.056,48.356 cw(c29.852,46.56) 29.852,49.1 33.476,49.1 cw(c33.476,48.076) 34.2,48.8 35.156,47.844 cw(c33.36,46.048) 35.9,46.048 v1(35.9,45.2)
NetLED.D.1_2: LED.D.1.2 LED.D.3.4 | length 45.1
  Top Layer w0.4: LED.D.3.4 cw(c10.506,40.6) 9.703,41.403 v1(10.2,41.9) ; v1@50.2,37.3 LED.D.1.2
  Bottom Layer w0.4: v1(10.2,41.9) cw(c11.166,40.934) 11.166,42.3 12.6,42.3 cw(c12.6,40.369) 13.966,41.734 14.6,41.1 ccw(c16.049,42.549) 16.049,40.5 28.059,40.5 ccw(c28.059,40.841) 28.3,40.6 cw(c28.541,40.359) 28.541,40.7 45.748,40.7 cw(c45.748,38.16) 47.544,39.956 v1(50.2,37.3)
NetLED.D.1_4: LED.D.1.4 LED.R.16.1 | length 2.3
  Top Layer w1: LED.D.1.4 56.702,40.732 LED.R.16.1
NetLED.D.3_2: LED.D.3.2 LED.R.9.2 | length 2.2
  Top Layer w1: LED.R.9.2 4.498,37.224 cw(c4.746,37.224) LED.D.3.2
NetMCU.C.9_1: MCU.C.9.1 MCU.U.5.20 MCU.Y.1.1 | length 7.6
  Top Layer w0.2: MCU.U.5.20 36.948,40.3 cw(c36.948,37.76) 38.744,39.556 39.776,38.524 ccw(c40.8,39.548) MCU.Y.1.1 40.8,36.883 ccw(c41.483,36.883) MCU.C.9.1
NetMCU.C.19_2: MCU.C.19.2 MCU.R.11.2 MCU.Y.1.3 | length 3.8
  Top Layer w0.27: MCU.Y.1.3 ccw(c43.241,40.141) 43.241,39.8 MCU.C.19.2 ccw(c44.311,40.289) 45.002,40.289 MCU.R.11.2
NetMCU.J.1_2: MCU.J.1.2 MCU.R.1.1 | length 2.2
  Top Layer w0.5: MCU.J.1.2 cw(c10.693,37.093) 12.4,37.093 MCU.R.1.1
NetMCU.R.1_2: MCU.R.1.2 MCU.R.2.2 MCU.U.1.1 MCU.U.5.56 | length 19.8
  Top Layer w0.2: MCU.U.1.1 ccw(c17.911,33.65) 16.98,32.72 17.1,32.6 ccw(c18.066,33.566) 18.066,32.2 21.1,32.2 ccw(c21.1,33.407) 21.954,32.554 27,37.6 cw(c28.69,35.91) 28.69,38.3 MCU.U.5.56
  Top Layer w0.65: MCU.R.2.2 15.273,34.198 cw(c15.273,32.328) MCU.U.1.1
  Top Layer w1: MCU.R.1.2 MCU.R.2.2
NetMCU.R.11_1: MCU.R.11.1 MCU.U.5.21 | length 7.8
  Top Layer w0.2: MCU.U.5.21 39.817,40.7 ccw(c39.817,41.383) 40.3,40.9 cw(c40.783,40.417) 40.783,41.1 41.6,41.1 ccw(c41.6,41.818) 42.108,41.31 MCU.R.11.1@42.998,42.2
NetMCU.R.17_2: MCU.R.17.2 MCU.U.5.26 | length 7.7
  Top Layer w0.2: MCU.U.5.26 37.417,42.7 ccw(c37.417,43.383) 37.9,42.9 cw(c38.624,42.176) 38.624,43.2 40.946,43.2 ccw(c40.946,45.74) 42.742,43.944 MCU.R.17.2
NetMCU.U.1_2: MCU.U.1.2 MCU.U.5.55 | length 13
  Top Layer w0.2: MCU.U.1.2 cw(c18.626,33.65) 18.088,34.188 19.556,35.656 cw(c21.352,33.86) 21.352,36.4 24.179,36.4 ccw(c24.179,38.94) 25.975,37.144 27.02,38.188 ; 27.021,38.19 cw(c28.252,36.96) 27.055,38.223 ccw(c26.781,38.514) 27.057,38.224 cw(c28.252,36.96) 27.099,38.263 cw(c28.252,36.96) 27.184,38.334 ; 27.185,38.334 cw(c28.252,36.96) 27.224,38.363 cw(c28.349,36.651) 28.349,38.7 MCU.U.5.55
NetMCU.U.1_3: MCU.U.1.3 MCU.U.5.54 | length 12.9
  Top Layer w0.2: MCU.U.1.3 cw(c20.789,33.65) 19.619,34.819 v3(19.8,35) ; v3(20.5,37) ccw(c20.983,37.483) 20.983,36.8 23.848,36.8 ccw(c23.848,39.74) 24.138,36.814 ccw(c23.848,39.74) 24.252,36.828 ccw(c23.848,39.74) 24.748,36.941 ccw(c23.848,39.74) 25.472,37.289 ccw(c23.848,39.74) 25.926,37.661 26.738,38.472 cw(c28.252,36.96) 26.781,38.514 cw(c28.252,36.96) 26.833,38.562 cw(c28.252,36.96) 26.939,38.65 cw(c28.252,36.96) 27.002,38.697 cw(c28.252,36.96) 27.097,38.761 27.116,38.774 cw(c28.252,36.96) 27.309,38.881 cw(c28.252,36.96) 27.512,38.968 cw(c28.252,36.96) 27.601,38.998 cw(c28.252,36.96) 28.252,39.1 MCU.U.5.54
  Bottom Layer w0.26: v3(19.8,35) ccw(c18.11,36.69) 20.5,36.69 v3(20.5,37)
NetMCU.U.1_5: MCU.U.1.5 MCU.U.5.53 | length 12.6
  Top Layer w0.2: v3(20.3,38.1) 20.456,37.944 ccw(c22.252,39.74) 22.252,37.2 23.848,37.2 ccw(c23.848,39.74) 25.644,37.944 26.456,38.756 cw(c28.252,36.96) 28.252,39.5 MCU.U.5.53 ; MCU.U.1.5 20.405,40.071 ccw(c21.071,40.071) v3(20.6,39.6)
  Bottom Layer w0.26: v3(20.3,38.1) 20.3,38.876 cw(c21.324,38.876) v3(20.6,39.6)
NetMCU.U.1_6: MCU.U.1.6 MCU.U.5.52 | length 12.1
  Top Layer w0.2: MCU.U.1.6 ccw(c21.03,40.95) 19.69,39.61 20.956,38.344 ccw(c22.752,40.14) 22.752,37.6 23.648,37.6 ccw(c23.648,40.14) 25.444,38.344 26.256,39.156 cw(c28.052,37.36) 28.052,39.9 MCU.U.5.52
NetMCU.U.1_7: MCU.U.1.7 MCU.U.5.51 | length 15.6
  Top Layer w0.2: MCU.U.1.7 cw(c18.867,40.95) 18.158,41.658 18.4,41.9 cw(c19.366,40.934) 19.366,42.3 20.276,42.3 cw(c20.276,41.276) 21,42 cw(c20.276,41.276) 21.3,41.276 21.3,39.566 ccw(c22.666,39.566) 21.7,38.6 ccw(c23.149,40.049) 23.149,38 23.51,38 ccw(c23.51,40.39) 25.2,38.7 26.056,39.556 cw(c27.852,37.76) 27.852,40.3 MCU.U.5.51
NetMCU.U.5_2: MCU.U.5.2 MOS.R.5.1 MOS.U.2.12 | length 20.7
  Top Layer w0.2: MCU.U.5.2 30.1,37.053 ccw(c31.078,37.053) v1(30.386,36.361)
  Top Layer w1: MOS.U.2.12 38.266,25.396 cw(c38.266,25.068) MOS.R.5.1
  Bottom Layer w0.4: v1(30.386,36.361) cw(c30.386,34.544) 31.671,35.829 32.156,35.344 ccw(c33.952,37.14) 33.952,34.6 35.3,34.6 cw(c35.3,32.669) 36.666,34.034 38.156,32.544 cw(c36.36,30.748) 38.9,30.748 38.9,28.982 cw(c36.36,28.982) 38.156,27.186 MOS.U.2.12
NetMCU.U.5_4: MCU.U.5.4 MOS.U.2.10 | length 13.2
  Top Layer w0.2: MCU.U.5.4 30.9,36.941 ccw(c31.241,36.941) 31,36.7 cw(c30.759,36.459) 31.1,36.459 v1(31.1,35.3)
  Bottom Layer w0.4: v1(31.1,35.3) ccw(c33.031,35.3) 31.666,33.934 32.288,33.312 ccw(c32.8,33.824) 32.8,33.1 34.648,33.1 cw(c34.648,30.56) 36.444,32.356 37.076,31.724 cw(c36.051,30.7) 37.5,30.7 cw(c36.018,30.7) 37.066,29.652 MOS.U.2.10
NetMCU.U.5_7: MCU.U.5.7 MOS.U.2.13 | length 19.6
  Top Layer w0.2: MCU.U.5.7 32.1,36.641 ccw(c32.441,36.641) v1(32.2,36.4)
  Bottom Layer w0.4: v1(32.2,36.4) 32.656,35.944 ccw(c34.452,37.74) 34.452,35.2 35.4,35.2 cw(c35.4,32.786) 37.107,34.493 38.856,32.744 cw(c37.06,30.948) 39.6,30.948 39.6,27.904 cw(c37.06,27.904) 38.856,26.108 MOS.U.2.13
NetMCU.U.5_9: MCU.U.5.9 MOS.U.2.11 | length 14.7
  Top Layer w0.2: v1(32.9,33.9) 32.89,33.99 32.9,34 32.9,34.522 cw(c33.473,34.575) 32.898,34.575 32.898,35.625 cw(c33.473,35.625) 32.9,35.678 MCU.U.5.9
  Bottom Layer w0.4: v1(32.9,33.9) 34.848,33.9 cw(c34.848,31.36) 36.644,33.156 37.564,32.236 cw(c36.027,30.7) 38.2,30.7 38.2,30.06 cw(c35.66,30.06) 37.456,28.264 MOS.U.2.11
NetMCU.U.5_12: MCU.U.5.12 MOS.U.2.9 | length 7.4
  Top Layer w0.2: MCU.U.5.12 34.1,36.941 ccw(c34.441,36.941) 34.2,36.7 cw(c32.751,35.251) 34.8,35.251 34.8,34.624 ccw(c35.824,34.624) 35.1,33.9 35.622,33.378 cw(c33.826,31.582) 36.366,31.582 MOS.U.2.9
NetMCU.U.5_16: MCU.U.5.16 MOS.U.2.7 | length 21.5
  Top Layer w0.2: MCU.U.5.16 36.317,38.7 cw(c36.317,38.017) v1(36.8,38.5)
  Bottom Layer w0.4: MOS.U.2.7 24.604,29.125 cw(c25.579,30.1) 24.2,30.1 24.2,31.248 cw(c26.74,31.248) 24.944,33.044 27.588,35.688 ccw(c27.076,36.2) 27.8,36.2 27.8,36.634 cw(c29.166,36.634) 28.2,37.6 cw(c28.924,36.876) 28.924,37.9 35.351,37.9 ccw(c35.351,39.949) v1(36.8,38.5)
NetMCU.U.5_46: MCU.U.5.46 USB.R.6.2 | length 16.9
  Top Layer w0.2: v1(26.705,42.998) 26.7,43 26.734,43 cw(c26.734,41.634) 27.7,42.6 ccw(c28.424,43.324) 28.424,42.3 MCU.U.5.46
  Top Layer w0.3: v1(33.6,48.3) 33.6,49.553 cw(c36.14,49.553) 34.344,51.349 USB.R.6.2 cw(c34.454,51.941) USB.R.6.2@34.454,51.6
  Bottom Layer w0.3: v1(26.705,42.998) 26.705,44.853 cw(c29.245,44.853) 27.449,46.649 28,47.2 cw(c29.69,45.51) 29.69,47.9 32.634,47.9 ccw(c32.634,49.266) v1(33.6,48.3)
NetMCU.U.5_47: MCU.U.5.47 USB.R.7.2 | length 10.5
  Top Layer w0.2: v1(27.189,42.187) 27.2,42.2 ccw(c27.924,42.924) 27.924,41.9 MCU.U.5.47
  Top Layer w0.4: v1(31.5,47.1) 32.328,47.928 cw(c32.502,47.753) USB.R.7.2
  Bottom Layer w0.4: v1(27.189,42.187) ccw(c26.439,42.937) 27.5,42.937 27.5,43.6 cw(c29.914,43.6) 28.207,45.307 29.5,46.6 cw(c30.707,45.393) 30.707,47.1 v1(31.5,47.1)
NetMOS.C.10_2: MOS.C.10.2 MOS.C.11.2 MOS.U.2.3 | length 4.8
  Top Layer w1: MOS.C.11.2 24.108,20.306 cw(c25.666,18.748) MOS.U.2.3 25.604,20.951 cw(c25.604,23.491) 23.807,21.695 MOS.C.10.2
NetMOS.R.3_1: MOS.R.3.1 MOS.R.4.2 | length 2.1
  Top Layer w1: MOS.R.4.2 MOS.R.3.1
NetMOS.R.4_1: MOS.R.4.1 MOS.U.2.15 | length 2.4
  Top Layer w1: MOS.U.2.15 cw(c36.452,19.976) 36.452,20.098 MOS.R.4.1
NetREG.C.15_2: REG.C.15.2 REG.U.3.4 | length 2.2
  Top Layer w0.6: REG.U.3.4 20.85,55.885 cw(c21.013,55.885) REG.C.15.2
NetUSB.FB.1_1: USB.FB.1.1 USB.J.3.2 USB.J.3.11 USB.Z.1.4 USB.Z.1.5 | length 20.1
  Top Layer w0.45: USB.FB.1.1 27.906,53.708 ccw(c26.11,55.505) 28.65,55.505 ; USB.J.3.11 28.65,55.505 ; USB.Z.1.5 USB.Z.1.4 29,54.6 cw(c29.845,55.445) 28.65,55.445 28.65,55.505 ; v1(33.3,60.6) ccw(c33.179,60.721) 33.35,60.721 USB.J.3.2
  Bottom Layer w0.45: v1@28.809,54.845 ccw(c28.809,54.691) v1(28.7,54.8) 28.7,54.948 cw(c31.24,54.948) 29.444,56.744 v1(33.3,60.6)
NetUSB.FB.2_1: USB.FB.2.1 USB.J.3.5 USB.J.3.8 USB.Z.1.3 | length 13.3
  Top Layer w0.26: USB.J.3.8 30.25,62.238 cw(c30.762,62.238) 30.4,62.6 cw(c30.641,62.359) 30.641,62.7 31.359,62.7 cw(c31.359,62.359) 31.6,62.6 cw(c31.238,62.238) 31.75,62.238 USB.J.3.5
  Top Layer w0.27: USB.J.3.5 31.75,55.104 ccw(c32.604,55.104) 32,54.5 USB.Z.1.3
  Top Layer w0.55: USB.Z.1.3 33.853,54.05 cw(c33.853,52.855) USB.FB.2.1
NetUSB.FB.2_2: USB.FB.2.2 USB.R.6.1 | length 2
  Top Layer w0.5: USB.R.6.1 36.702,51.702 USB.FB.2.2
NetUSB.FB.3_1: USB.FB.3.1 USB.J.3.6 USB.J.3.7 USB.Z.1.1 | length 13.8
  Top Layer w0.27: USB.J.3.6 USB.J.3.7 30.75,54.621 cw(c30.579,54.621) 30.7,54.5 ccw(c31.183,54.017) 30.5,54.017 30.5,53.1 ccw(c31.466,53.1) 30.783,52.417 30.8,52.4 ccw(c31.404,53.004) 31.404,52.15 USB.Z.1.1
  Top Layer w0.55: USB.Z.1.1 32.45,50.227 ccw(c32.629,50.227) USB.FB.3.1
NetUSB.FB.3_2: USB.FB.3.2 USB.R.7.1 | length 2.1
  Top Layer w1: USB.R.7.1 USB.FB.3.2
NetUSB.J.3_3: USB.J.3.3 USB.R.14.2 USB.R.15.2 | length 10.1
  Top Layer w0.26: USB.J.3.3 32.75,62.214 cw(c34.286,62.214) 33.2,63.3 cw(c33.924,62.576) 33.924,63.6 35.276,63.6 cw(c35.276,62.576) 36,63.3 cw(c35.276,62.576) 36.3,62.576 36.3,62.4 ccw(c38.237,62.4) 36.867,61.03 USB.R.15.2
  Top Layer w0.5: USB.R.14.2 USB.R.15.2
NetUSB.J.3_9: USB.J.3.9 USB.R.12.2 USB.R.13.2 | length 10.5
  Top Layer w0.26: USB.R.13.2 24.956,60.754 ccw(c23.16,62.55) 25.7,62.55 25.7,62.676 cw(c26.724,62.676) 26,63.4 cw(c26.724,62.676) 26.724,63.7 27.548,63.7 cw(c27.548,61.16) 29.344,62.956 29.5,62.8 cw(c28.896,62.196) 29.75,62.196 USB.J.3.9
  Top Layer w0.5: USB.R.12.2 USB.R.13.2
V_USB: LED.C.20.2 LED.C.23.2 LED.D.1.1 LED.D.3.1 REG.C.12.2 REG.C.16.2 REG.U.3.1 REG.U.3.3 REG.U.4.1 REG.U.4.3 USB.FB.1.2 | length 97.8
  Top Layer w0.4: REG.U.3.3 23.946,54.246 cw(c24.8,53.393) 24.8,54.6 25.717,54.6 cw(c25.717,53.917) 26.2,54.4 cw(c25.717,53.917) 26.4,53.917 26.4,51.839 ccw(c26.741,51.839) 26.5,51.598
  Top Layer w0.5: LED.D.3.1 ccw(c4.504,40.666) LED.D.3.1@4.598,40.666
  Top Layer w0.6: LED.D.3.1@4.598,40.666 ccw(c6.682,40.666) 5.208,39.192 12.356,32.044 ccw(c14.152,33.84) 14.152,31.3 17.424,31.3 ; REG.U.4.3 ccw(c17.409,27.75) 17.579,27.921 16.8,28.7 cw(c17.524,29.424) 16.5,29.424 16.5,30.517 cw(c17.183,30.517) 16.7,31 cw(c17.424,30.276) 17.424,31.3 ; REG.U.4.1 19.55,29.774 cw(c19.729,29.774) REG.C.16.2 18.487,31.015 ccw(c17.8,30.329) 17.8,31.3 17.424,31.3 ; REG.U.3.1 24.349,51.95 cw(c24.349,50.747) REG.C.12.2
  Top Layer w0.8: v4(50.2,41.7) 51.209,40.691 ccw(c51.67,41.152) LED.D.1.1
  Top Layer w1: LED.D.3.1@4.598,40.666 LED.C.23.2 cw(c5.557,42.8) 4.879,43.479 5.3,43.9 cw(c6.507,42.693) 6.507,44.4 7.793,44.4 cw(c7.793,42.693) 9,43.9 ccw(c9.724,44.624) 9.724,43.6 19.548,43.6 ccw(c19.548,46.14) 21.344,44.344 23.9,46.9 ccw(c23.176,47.624) 24.2,47.624 24.2,48.193 cw(c25.907,48.193) 24.7,49.4 ccw(c23.493,50.607) 25.2,50.607 REG.C.12.2 26.5,51.598 USB.FB.1.2 27.901,51.497 ccw(c29.1,52.696) v4(29.1,51) ; LED.C.20.2 51.398,40.772 LED.D.1.1
  Bottom Layer w0.8: v4(29.1,51) 29.548,51 ccw(c29.548,53.54) 31.344,51.744 32.841,53.241 cw(c33.708,52.374) 33.708,53.6 35.244,53.6 cw(c35.244,46.223) 40.461,51.439 v4(50.2,41.7)
pads on no net: BTN.SW.3. BTN.SW.4. BTN.SW.6. BTN.SW.8. LBS.SW.1. LBS.SW.2. LED.R.9.1 MCH.FID.1.1 MCH.FID.2.1 MCU.U.5.24 MCU.U.5.25 MOS.U.2. MOS.U.2.1 MOS.U.2.2 MOS.U.2.6 MOS.U.2.14 MOS.U.2.16 REG.U.4.4 USB.J.3. USB.J.3.4 USB.J.3.10 USB.Z.1.6

## Polygon pours and split planes (outlines as drawn)
GND on Top Layer "GND_L01_P006" (solid, remove dead copper, pour order 6): 0,0 0,68 62,68 62,0
3V3 on Top Layer "3V3_L01_P002" (solid, remove dead copper, pour order 2): 29.7,44.325 29.7,47.1 28.1,48.7 27.3,48.7 27.1,48.5 27.1,44.4 28.5,43 29.2,43 29.7,43.5
3V3 on Top Layer "3V3_L01_P004" (solid, remove dead copper, pour order 4): 29.8,37.9 29.3,37.9 28.2,36.8 28.2,36 29.8,36
3V3 on Top Layer "3V3_L01_P003" (solid, remove dead copper, pour order 3): 29.2,41.5 27,41.5 26,42.5 25.4,42.5 25.4,41.1 29.2,41.1
3V3 on Top Layer "3V3_L01_P001" (solid, remove dead copper, pour order 1): 19.9,52.3 19.3,51.7 19.3,50.6 19.9,50 19.9,47.1 20.1,46.9 21.2,46.9 21.4,47.1 21.4,50.1 22.2,50.9 22.2,51.5 21.4,52.3 21.3,52.3
3V3 on Top Layer "3V3_L01_P000" (solid, remove dead copper, pour order 0): 16.8,40.5 16.4,40.1 14,40.1 13.7,40.4 13.7,41.6 14.5,42.4 16.6,42.4 16.8,42.2
GND on Plane 2 "GND_L03_P008" (solid, remove dead copper, pour order 8): 0,0 0,68 62,68 62,0
3V3 on Plane 2 "3V3_L03_P005" (solid, remove dead copper, pour order 5): 20.4,54.4 39.6,54.4 45,49 45,27 42,24 40,24 37.7,26.3 37.7,30.7 36,32.4 18.6,32.4 15,36 14,37 14,48 16,50
GND on Plane 1 "GND_L02_P007" (solid, remove dead copper, pour order 7): 0,0 0,68 62,68 62,0
GND on Bottom Layer "GND_L04_P009" (solid, remove dead copper, pour order 9): 0,0 0,68 62,68 62,0

## Silkscreen, mask and mechanical layers (free items; w line width, h text height)
Top Overlay:
  text "Licensed under the / CERN-OHL-S v2 / Copyright Ploopy  / 2023" at 1.2,26.3 h2
  text "Madromys R1.001 / August 2023" at 59.7,14.8 h3 r90
Board Outline:
  the board outline again, w0.2

## Text inside footprints (layer, text, board x,y; h text height)
MCH.LOGO.2: Top Overlay "Y" at 2.6,20.1 h2.4; Top Overlay "X" at 5,17.6 h2.4
MOS.U.2: Top Overlay "Optic Side" at 27.141,32.995 h2; Bottom Overlay "Sensor Side" at 35.466,32.545 h2; Bottom Overlay "1" at 29.166,13.895 h4 r90